# Altium PCB EE_smallOB_BW_v1.0.PcbDoc (part 1 of 4)
Units mil, origin at the board's own origin, x right, y up, seen from the top; angles counter-clockwise.
Board outline 1388 x 1586.96 mil, 4 copper layers (Top Layer, Layer 1, Layer 2, Bottom Layer), stack 37.371 mil thick; 116 components, 102 nets, 640 pads, 211 vias.
Unrouted connection lines stored in the file: 1.
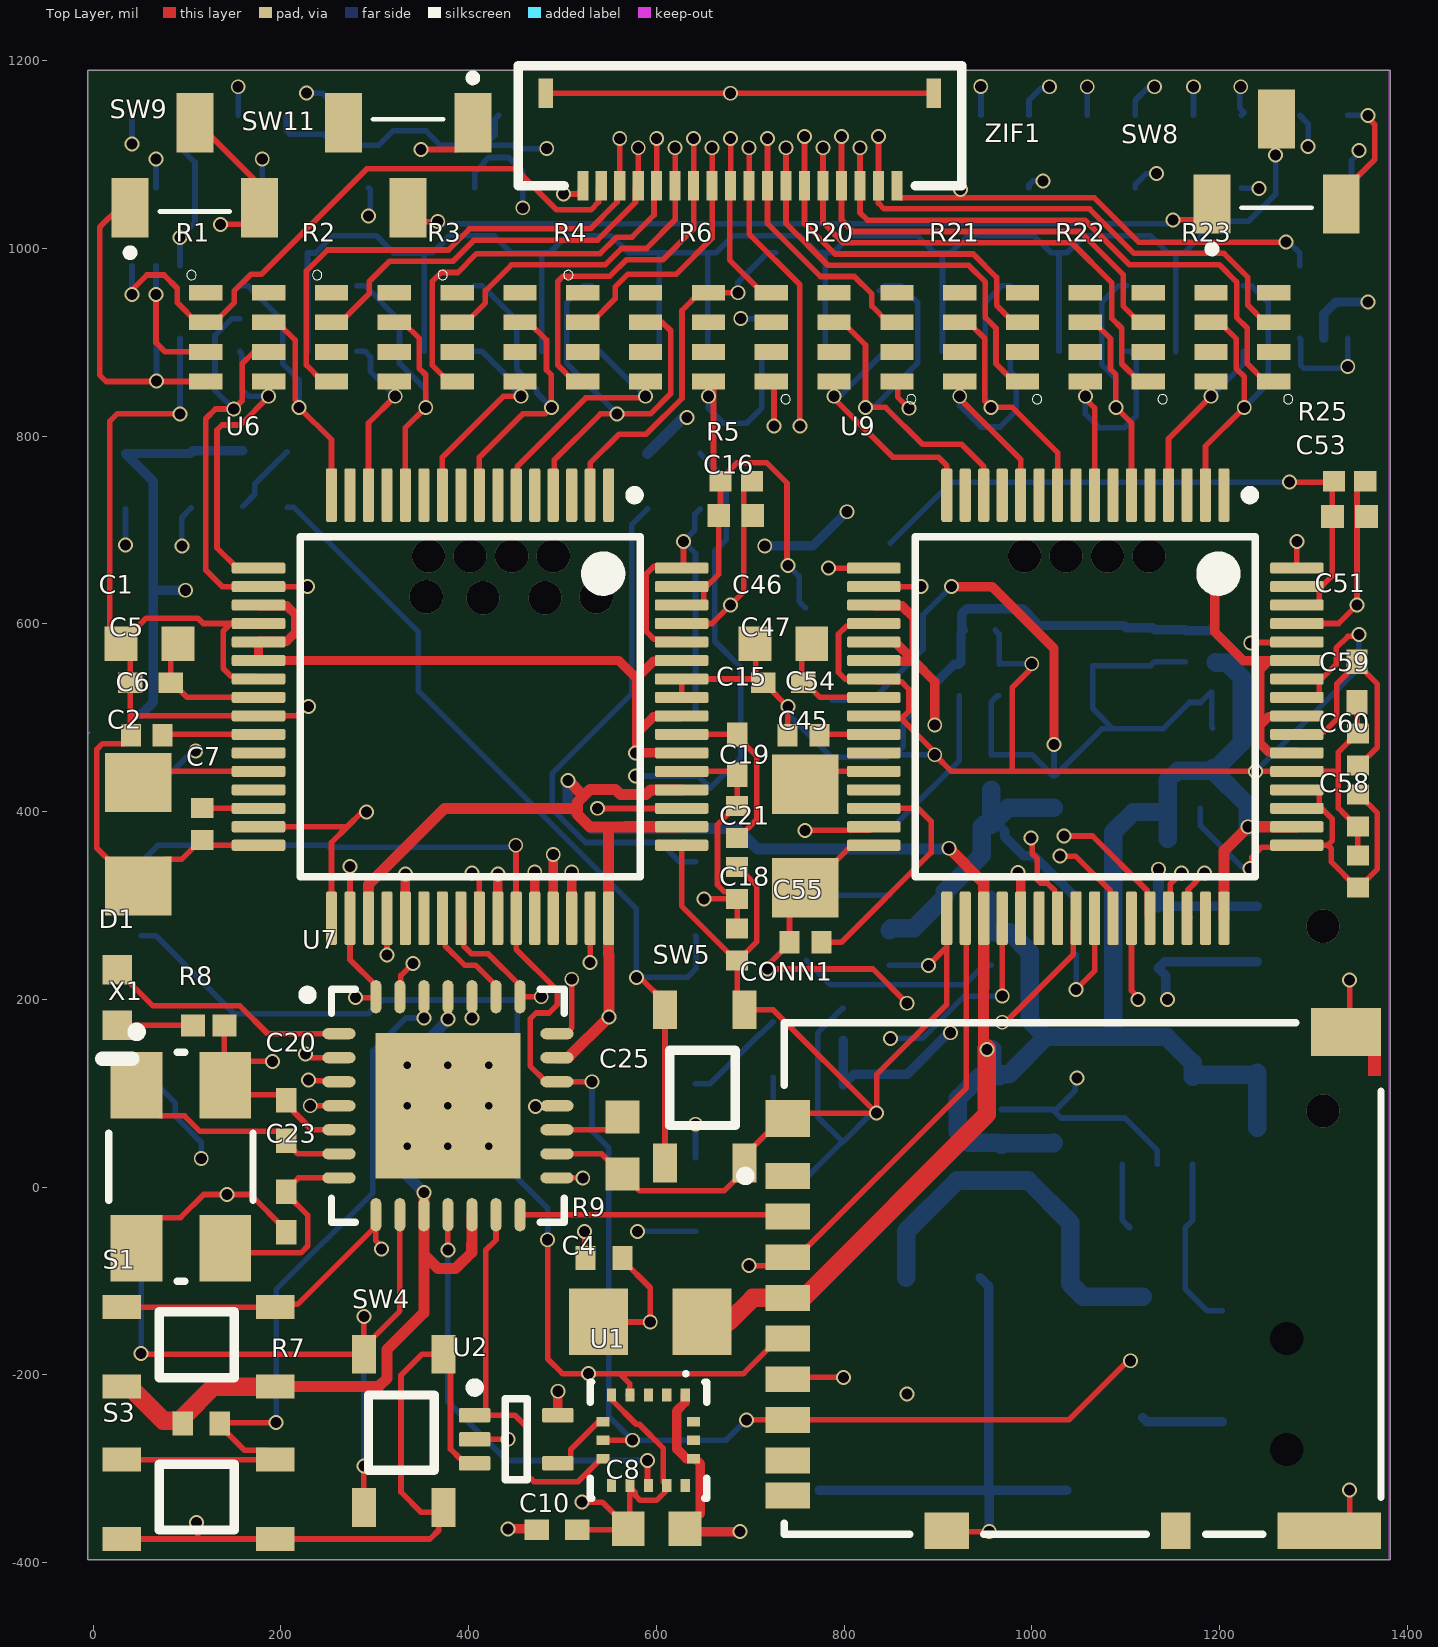
[diagram p0: Top Layer view]
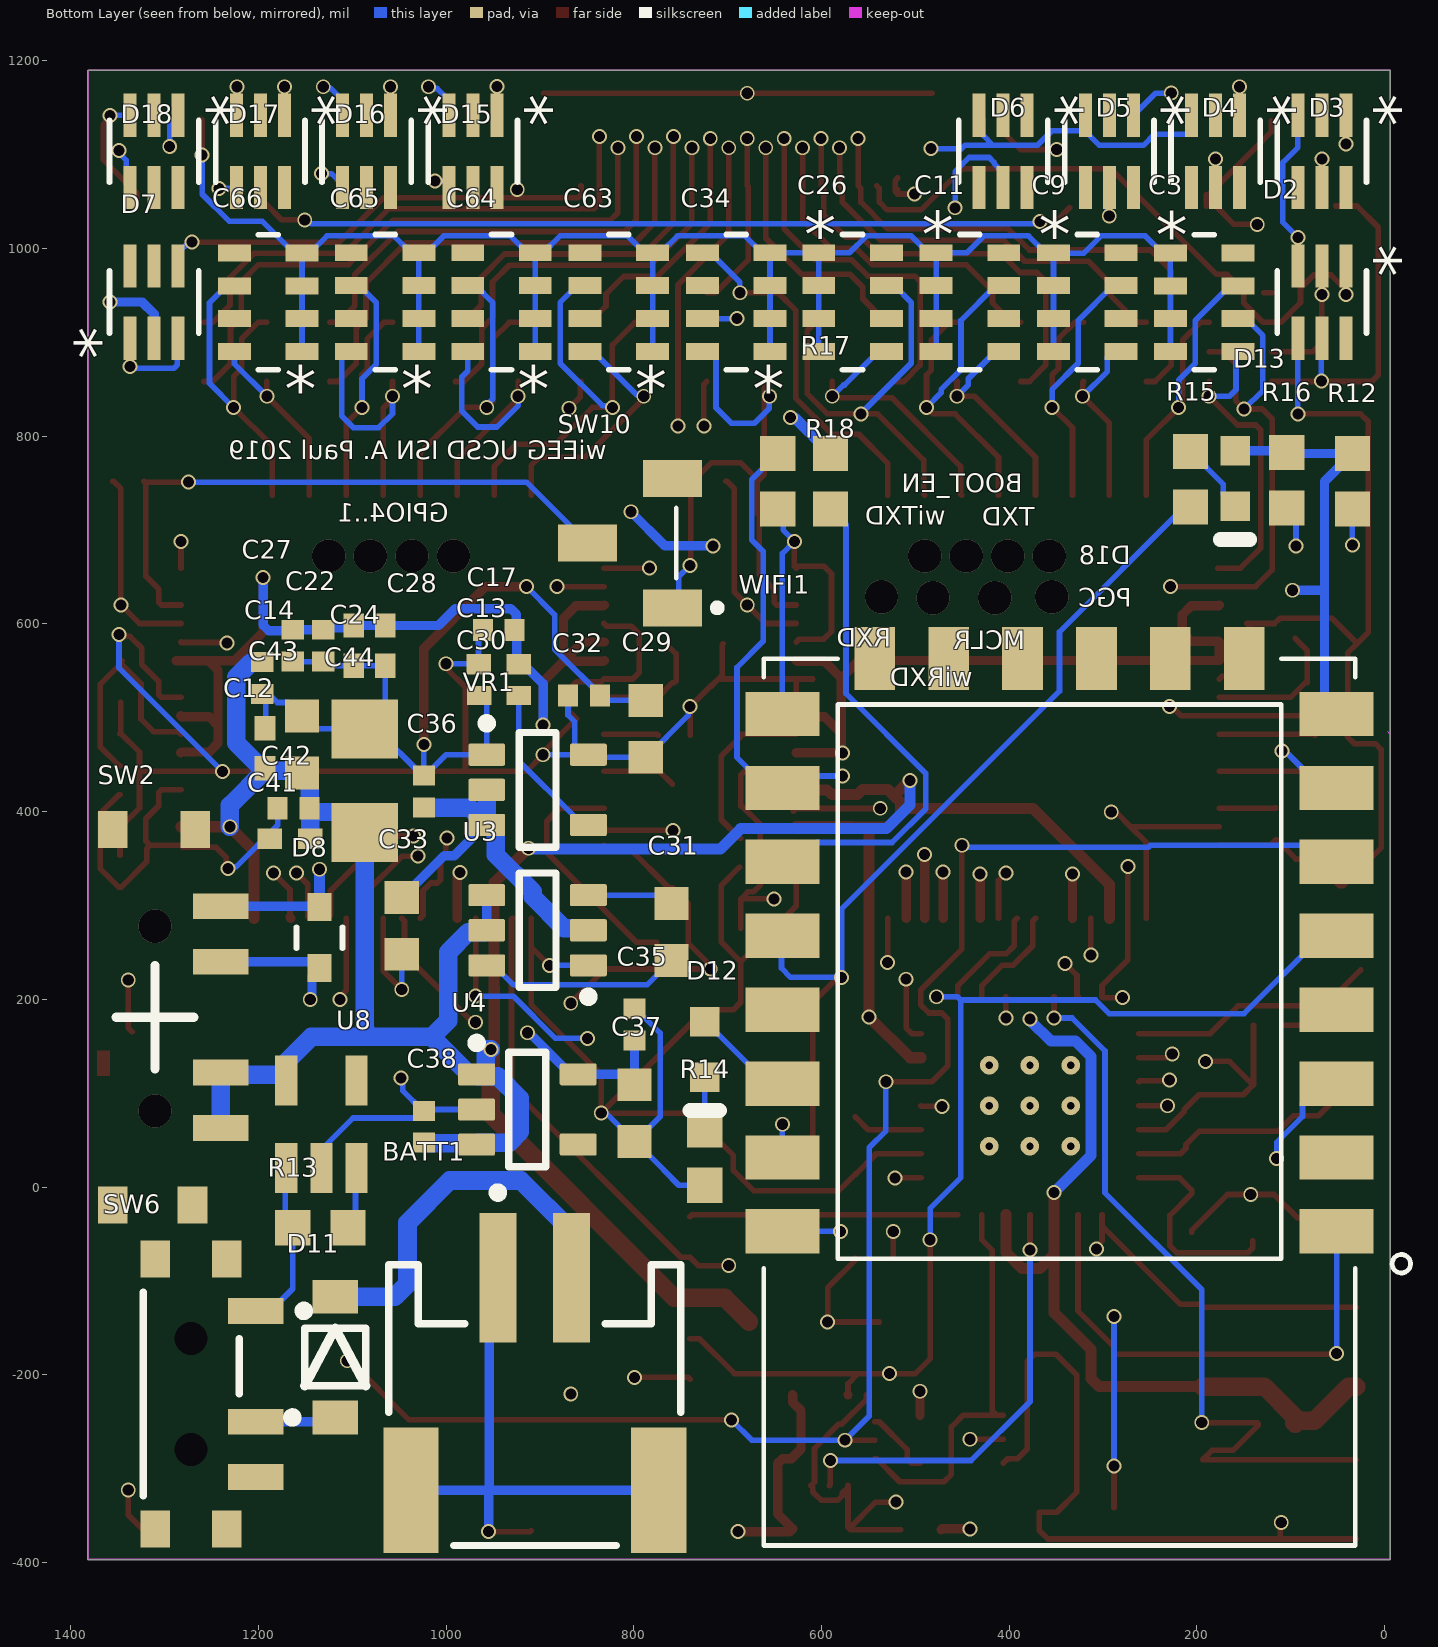
[diagram p1: Bottom Layer view, seen from below]
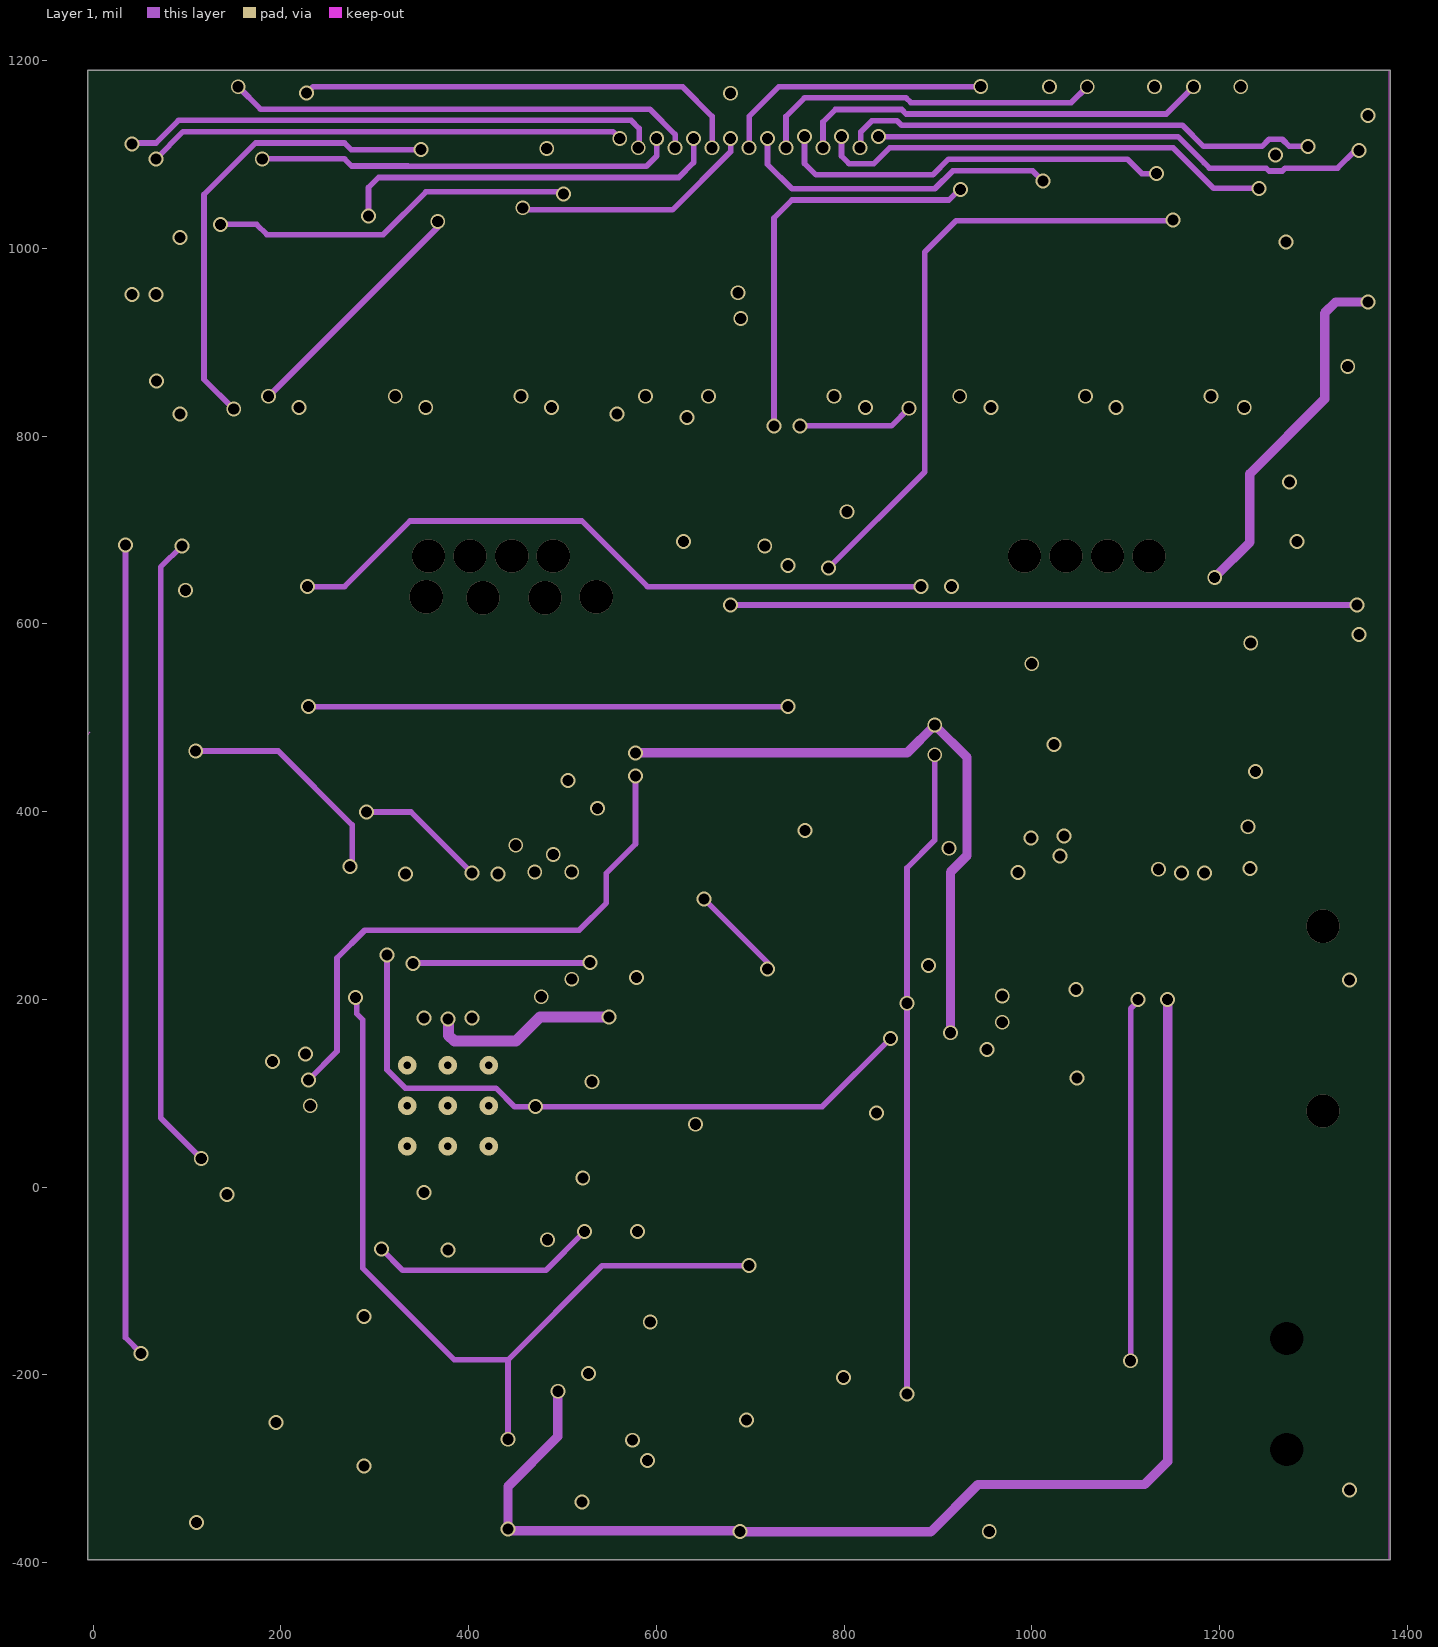
[diagram p2: Layer 1]
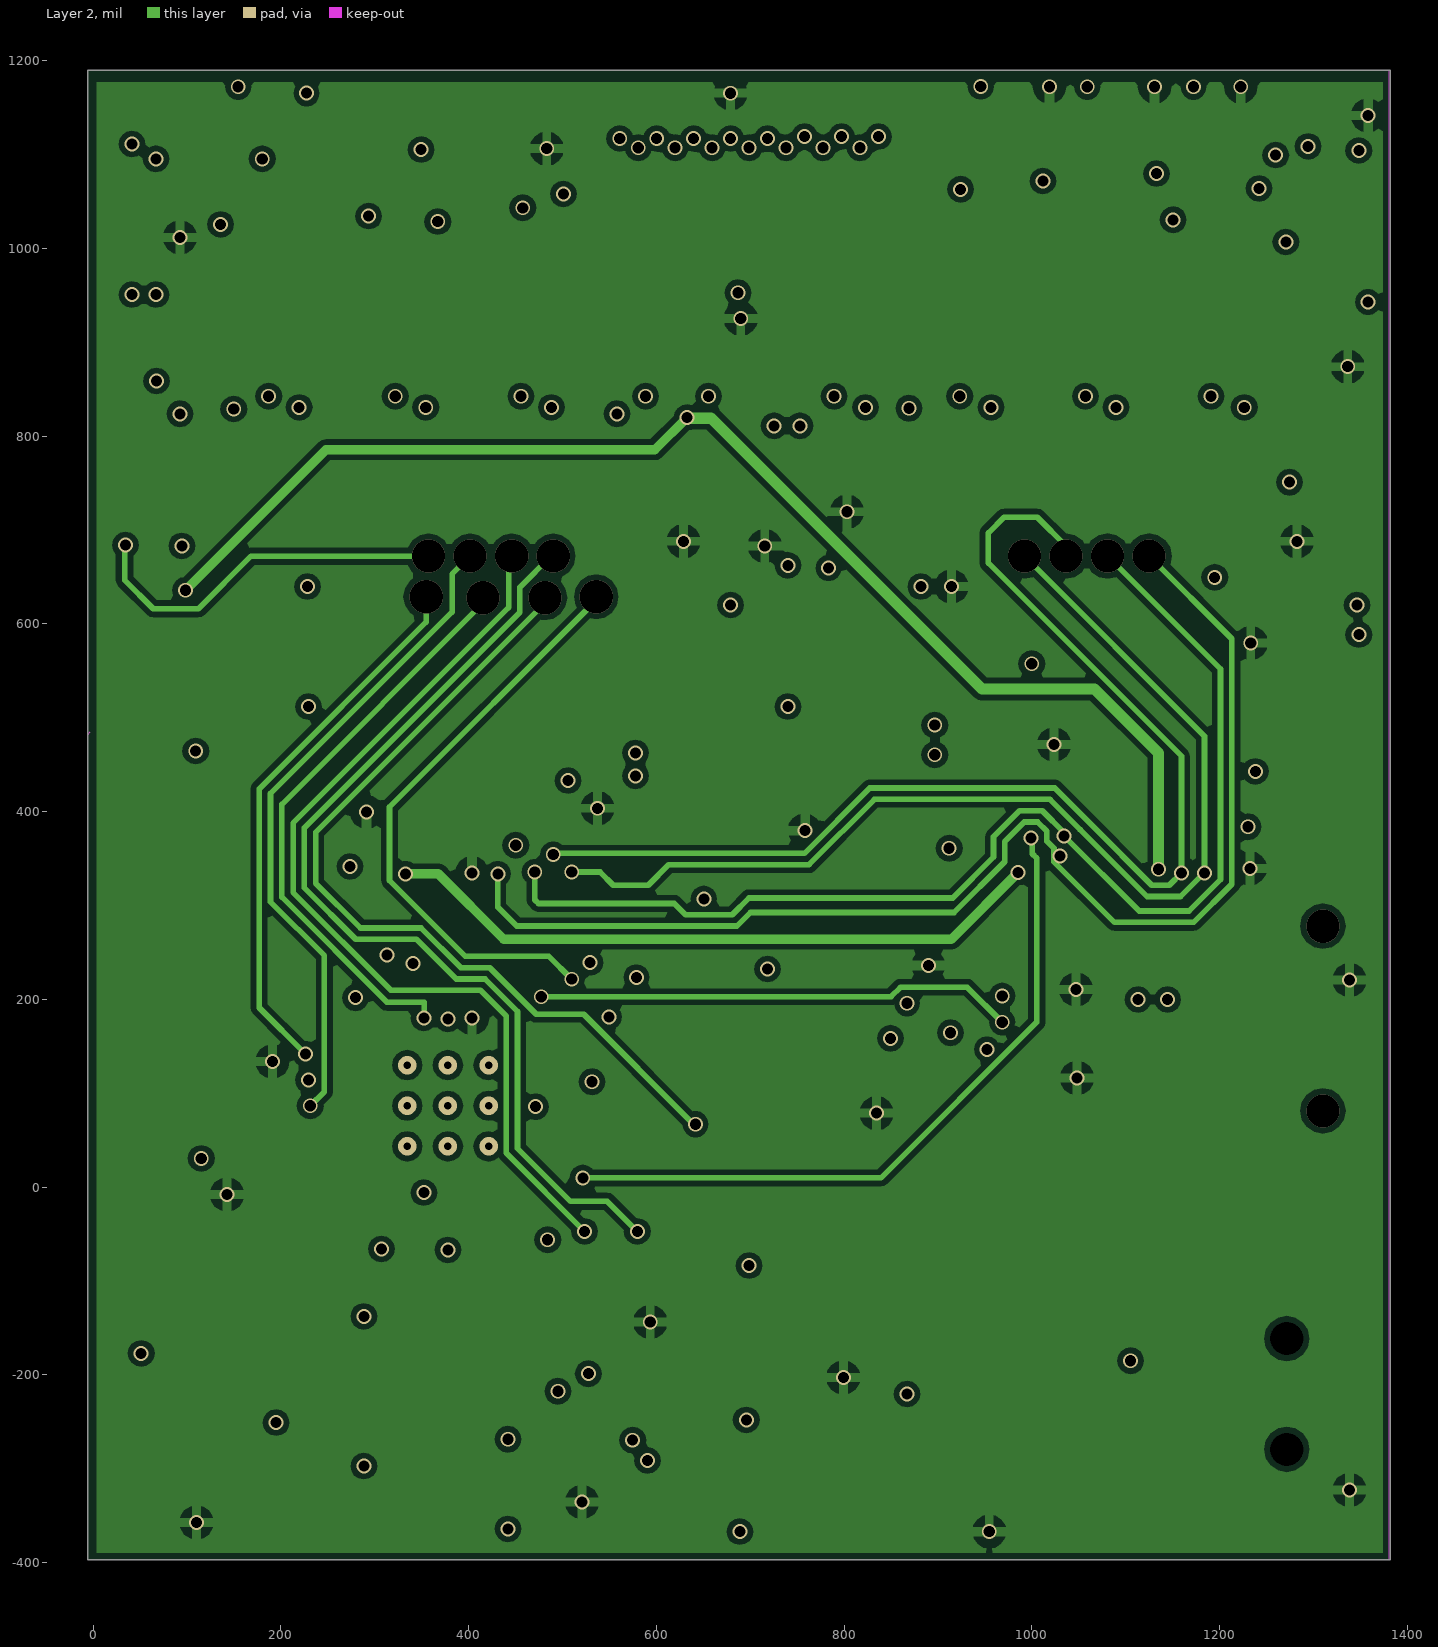
[diagram p3: Layer 2]
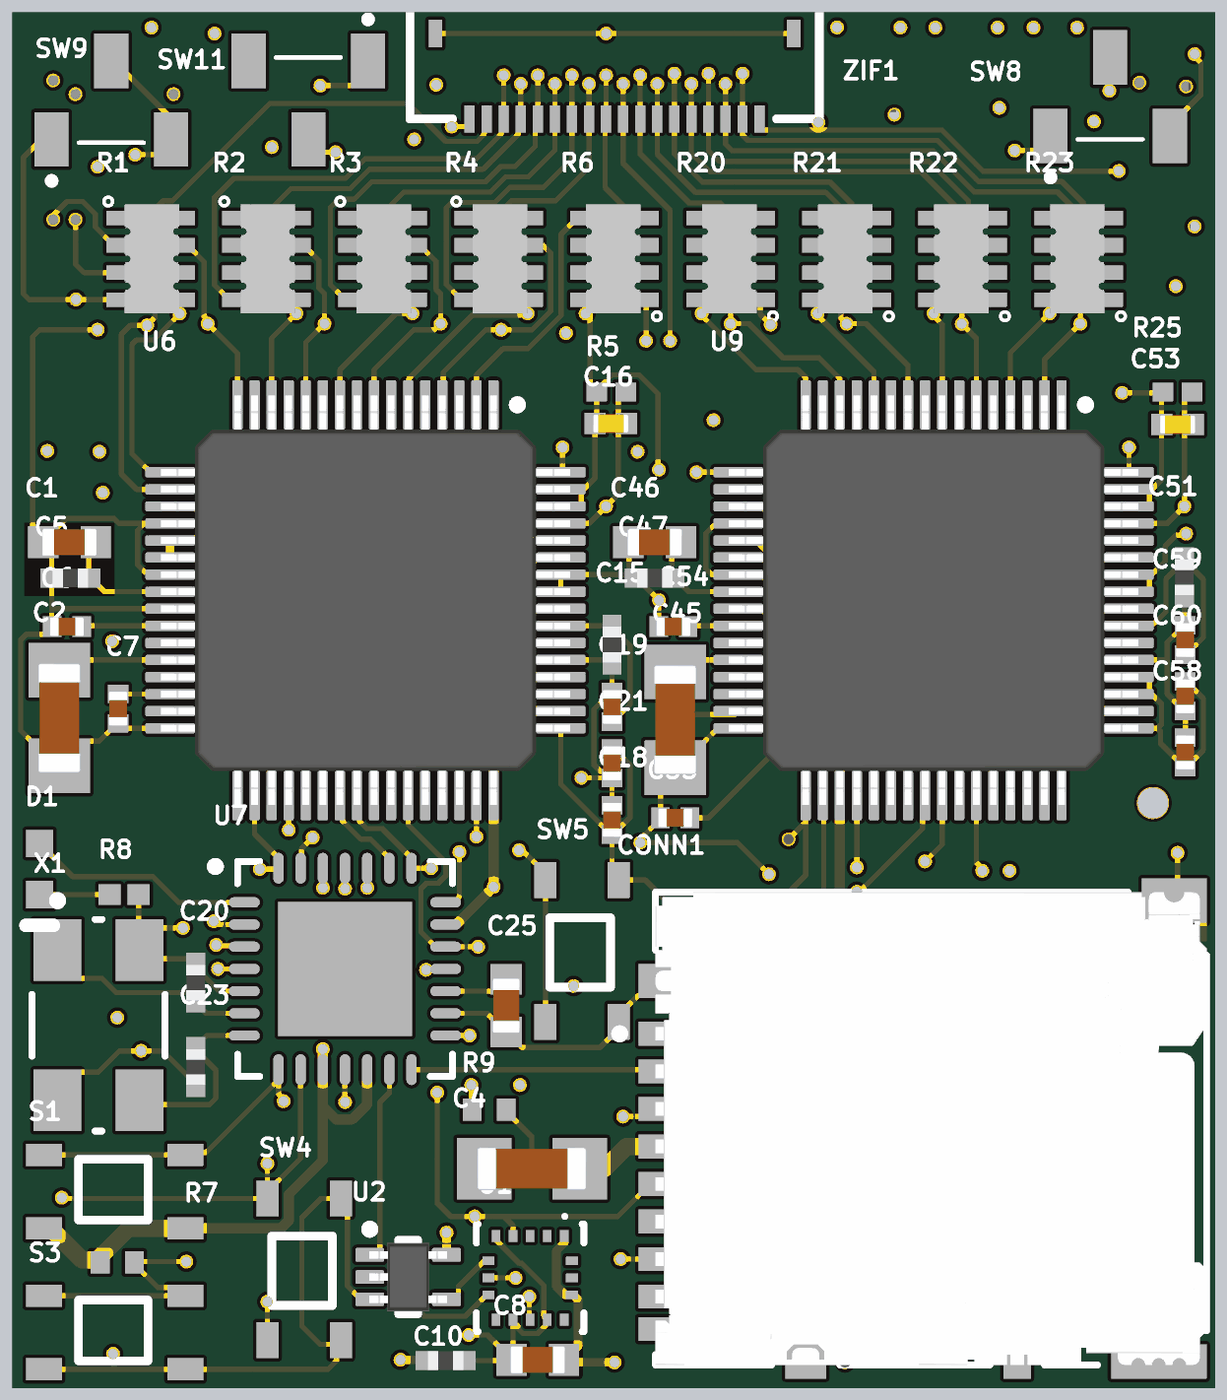
[diagram p5: 3D render of the assembled board from above, using the file's embedded part models]
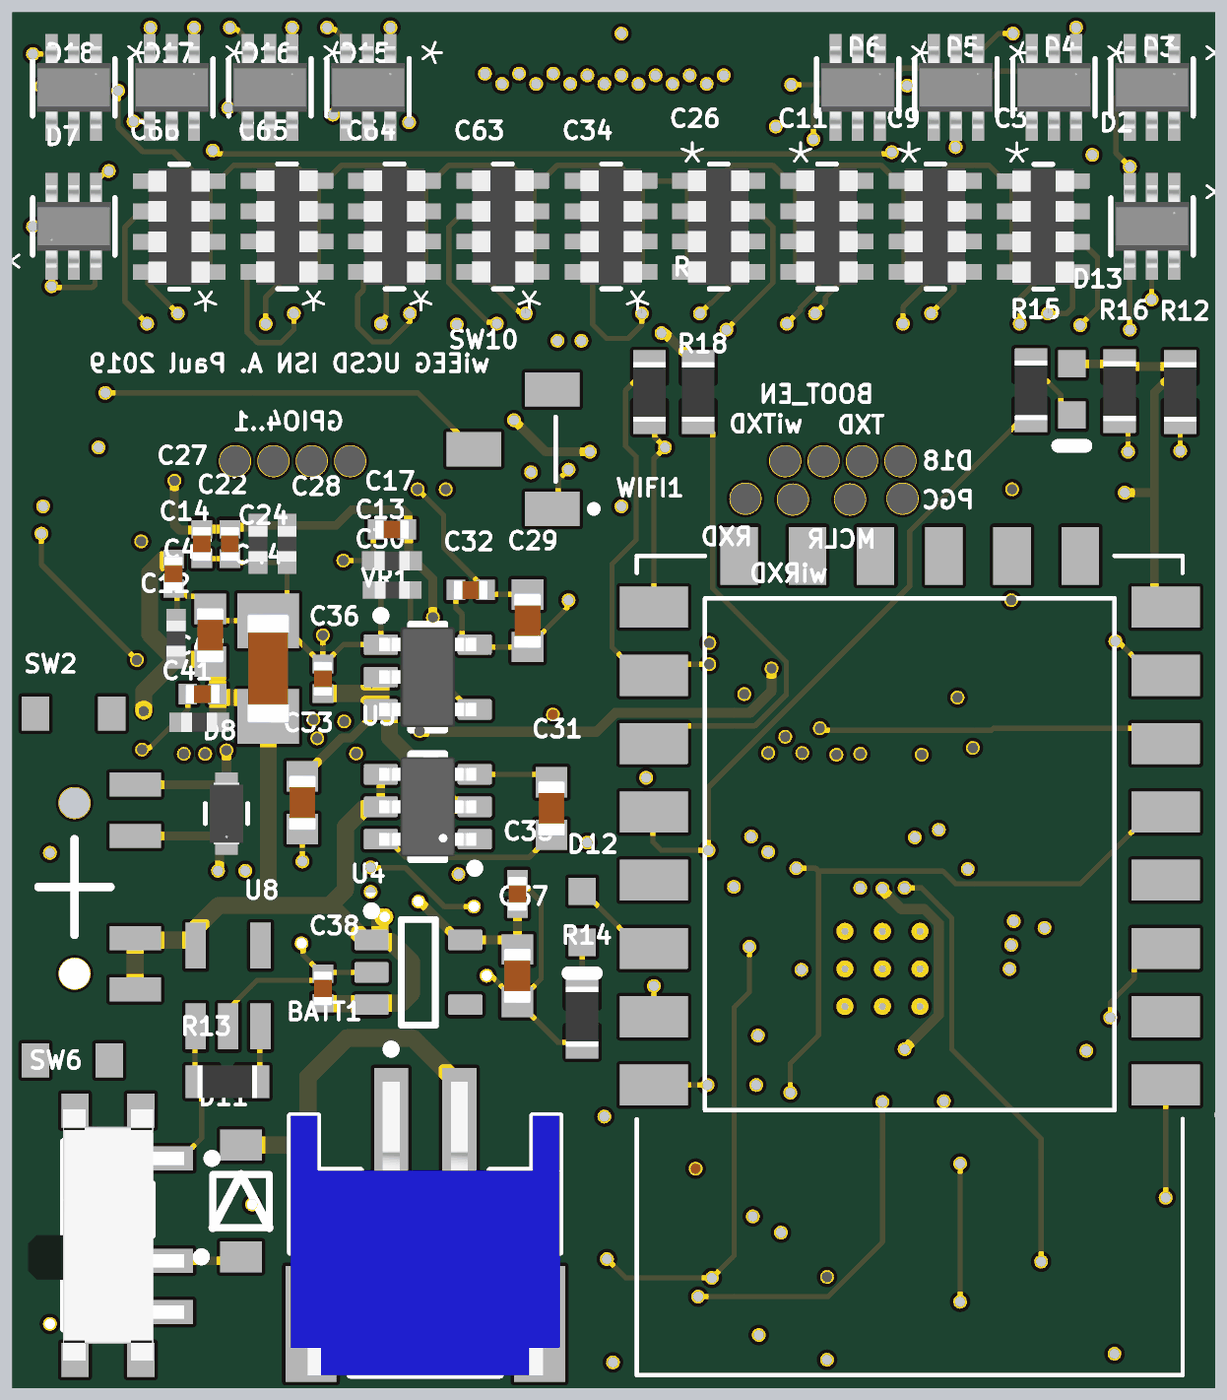
[diagram p6: 3D render of the assembled board from below, using the file's embedded part models]

## Layer stack, top to bottom
Top Solder: solder mask 1, SM-001, Dk 4
Top Layer: signal copper 1.3778
Dielectric 2: prepreg 2.8, PP-006, Dk 4.1
Layer 1: signal copper 1.3778
Dielectric 1: core 26.2598, Core-043, Dk 4.3
Layer 2: signal copper 1.3778
Dielectric 3: prepreg 2.8, PP-006, Dk 4.1
Bottom Layer: signal copper 1.3778
Bottom Solder: solder mask 1, SM-001, Dk 4

## Board outline
1382,1189.96 1382,-397 -6,-397 -6,1189.96

## Design rules (kind name [scope] priority, off if disabled: settings)
Clearance [All] p1: gap=6 ignorepadtopadclearanceinfootprint=FALSE
PolygonConnect [All] p1: connectstyle=Relief reliefconductorwidth=10 reliefentries=4 polygonreliefangle="90 Angle" airgapwidth=10
RoutingVias [All] p1: holewidth=11.81 width=23.78 viastyle="Through Hole" minholewidth=7.87 minwidth=15.87 maxholewidth=39.37 maxwidth=51.37
SolderMaskExpansion [All] p1: expansion=4 istentingtop=FALSE
Width Width_Power [(InNet('-RAW') OR InNet('+3V3') OR InNet('acl3V3') OR InNet('AVDD') OR InNet('DVDD') OR InNet('RAW'))] p1: maxlimit=19.68 minlimit=10 preferedwidth=19.68
Width [All] p2: maxlimit=20 minlimit=6 preferedwidth=10
30 further rules are at their usual default settings.

## Classes and differential pairs
component class wifi: D12 D13 R12 R14 R15 R16 R17 R18 SW4 SW5 WIFI1
component class sd_accel: C4 C8 C10 CONN1 U1 U2
component class power_supply: BATT1 C12 C13 C14 C17 C22 C24 C27 C28 C29 C30 C31 C32 C33 C35 C36 C37 C38 C41 C42 C43 C44 D8 D11 R13 SW2 SW6 U3 U4 U8 VR1
component class PIC: C20 C23 C25 D1 R7 R8 R9 S1 S3 U7 X1
component class interface2: C63 C64 C65 C66 D15 D16 D17 D18 R20 R21 R22 R23
component class interface1: C3 C9 C11 C26 C34 D2 D3 D4 D5 D6 D7 R1 R2 R3 R4 R6 SW8
component class Connectors: SW9 ZIF1
component class ADS_2: C45 C46 C47 C51 C53 C54 C55 C58 C59 C60 R25 SW10 U9
component class ADS_1: C1 C2 C5 C6 C7 C15 C16 C18 C19 C21 R5 SW11 U6

## Components (designator, comment, footprint, x,y, rotation, side; value= is the part's Value field where it differs from the comment)
BATT1 "S2B-PH-SM4-TB(LF)(SN)" "JST- S2B-PH-SM4-TB(LF)(SN)-2_V" 905.51,-232.28 r180 bottom
C1 "GRM188C80G106KE47D" *CAPC1608X90N 60.04,578.74 r180 top
C2 "GRM31CR60J107ME39K" *CAPC3216X190 48.23,375.98 r270 top
C3 "CA064C102K5RACTU" CA064 192.35,942.7 r180 bottom
C4 "GRM31CR60J107ME39K" *CAPC3216X190 593.5,-143.7 r180 top
C5 "CC0402KRX7R7BB104" YAG_CC0402 61.02,537.4 r180 top
C6 "GRM155R70J105KA12J" *CAPC1005X55N 57.09,481.3 r180 top
C7 "GRM155R70J105KA12J" *CAPC1005X55N 116.14,386.81 r270 top
C8 "GRM188C80G106KE47D" *CAPC1608X90N 600.39,-364.17 r180 top
C9 "CA064C102K5RACTU" CA064 316.93,942.91 r180 bottom
C10 "CC0402KRX7R7BB104" YAG_CC0402 494.09,-365.16 r0 top
C11 "CA064C102K5RACTU" CA064 441.93,942.91 r180 bottom
C12 "CC0402KRX7R7BB104" YAG_CC0402 1192.91,467.52 r90 bottom
C13 "CC0402KRX7R7BB104" YAG_CC0402 943.9,557.09 r0 bottom
C14 "GRM155R70J105KA12J" *CAPC1005X55N 1195.87,542.32 r270 bottom
C15 "CC0402KRX7R7BB104" YAG_CC0402 686.02,460.63 r90 top
C16 "CC0402KRX7R7BB102" CAPC1005X55X23NL05T08 684.65,715.55 r0 top
C17 "GRM155R70J105KA12J" *CAPC1005X55N 943.9,593.5 r0 bottom
C18 "GRM155R70J105KA12J" *CAPC1005X55N 686.02,258.58 r270 top
C19 "GRM155R70J105KA12J" *CAPC1005X55N 686.02,388.78 r270 top
C20 "CC0402JRNPO9BN180" YAG_CC0402 205.71,70.87 r270 top
C21 "GRM155R70J105KA12J" *CAPC1005X55N 686.02,323.82 r90 top
C22 "GRM155R70J105KA12J" *CAPC1005X55N 1130.91,576.77 r270 bottom
C23 "CC0402JRNPO9BN180" YAG_CC0402 205.71,-26.57 r90 top
C24 "CC0402KRX7R7BB104" YAG_CC0402 1098.43,576.77 r270 bottom
C25 "GRM188C80G106KE47D" *CAPC1608X90N 563.98,44.29 r270 top
C26 "CA064C102K5RACTU" CA064 566.93,942.91 r180 bottom
C27 "GRM155R70J105KA12J" *CAPC1005X55N 1163.39,576.77 r270 bottom
C28 "CC0402KRX7R7BB104" YAG_CC0402 1064.96,576.77 r270 bottom
C29 "GRM188C80G106KE47D" *CAPC1608X90N 787.4,488.19 r90 bottom
C30 "CC0402KRX7R7BB103" CC0402N 943.57,523.62 r180 bottom
C31 "GRM188C80G106KE47D" *CAPC1608X90N 759.84,271.65 r90 bottom
C32 "GRM155C80J225ME95D" *CAPC1005X55N 853.07,523.62 r180 bottom
C33 "GRM188C80G106KE47D" *CAPC1608X90N 1047.24,278.35 r90 bottom
C34 "CA064C102K5RACTU" CA064 690.94,942.91 r0 bottom
C35 "GRM155C80J225ME95D" *CAPC1005X55N 799.21,173.23 r90 bottom
C36 "GRM155C80J225ME95D" *CAPC1005X55N 1023.62,421.26 r90 bottom
C37 "GRM188C80G106KE47D" *CAPC1608X90N 799.21,78.74 r270 bottom
C38 "GRM155C80J225ME95D" *CAPC1005X55N 1023.62,64.25 r90 bottom
C41 "CC0402KRX7R7BB104" YAG_CC0402 1166.34,371.06 r0 bottom
C42 "GRM155R70J105KA12J" *CAPC1005X55N 1162.4,403.54 r0 bottom
C43 "GRM188C80G106KE47D" *CAPC1608X90N 1153.54,471.46 r90 bottom
C44 "GRM31CR60J107ME39K" *CAPC3216X190 1086.61,433.07 r90 bottom
C45 "GRM31CR60J107ME39K" *CAPC3216X190 758.86,374.02 r270 top
C46 "GRM188C80G106KE47D" *CAPC1608X90N 735.24,578.74 r180 top
C47 "CC0402KRX7R7BB104" YAG_CC0402 735.24,537.4 r180 top
C51 "CC0402KRX7R7BB104" YAG_CC0402 1346.46,538.11 r90 top
C53 "CC0402KRX7R7BB102" CAPC1005X55X23NL05T08 1338.58,714.57 r0 top
C54 "GRM155R70J105KA12J" *CAPC1005X55N 756.89,481.3 r180 top
C55 "GRM155R70J105KA12J" *CAPC1005X55N 758.86,260.83 r180 top
C58 "GRM155R70J105KA12J" *CAPC1005X55N 1347.44,336.34 r270 top
C59 "GRM155R70J105KA12J" *CAPC1005X55N 1347.44,465.98 r270 top
C60 "GRM155R70J105KA12J" *CAPC1005X55N 1347.44,401.02 r90 top
C63 "CA064C102K5RACTU" CA064 815.94,942.91 r0 bottom
C64 "CA064C102K5RACTU" CA064 940.94,942.91 r0 bottom
C65 "CA064C102K5RACTU" CA064 1064.96,942.91 r0 bottom
C66 "CA064C102K5RACTU" CA064 1189.54,942.7 r0 bottom
CONN1 "DM3AT-SF-PEJM5" HRS-DM3AT-8_V 1037.4,-100.39 r90 top
D1 "LTST-C193TBKT-5A" LTST-C193TBKT_V 25.59,201.77 r270 top
D2 "TPD4E1B06DCKR" DCK6 66.93,942.91 r270 bottom
D3 "TPD4E1B06DCKR" DCK6 66.93,1103.35 r270 bottom
D4 "TPD4E1B06DCKR" DCK6 180.12,1103.35 r270 bottom
D5 "TPD4E1B06DCKR" DCK6 293.31,1103.35 r270 bottom
D6 "TPD4E1B06DCKR" DCK6 406.5,1103.35 r270 bottom
D7 "TPD4E1B06DCKR" DCK6 1311.02,942.91 r90 bottom
D8 "CDSU400B" CDBU 1134.84,265.75 r90 bottom
D11 "MBR120VLSFT3G" ONSC-SOD-123FL-2-498-01_V 1118.11,-181.1 r90 bottom
D12 "LTST-C193TBKT-5A" LTST-C193TBKT_V 724.41,146.65 r270 bottom
D13 "LTST-C193TBKT-5A" LTST-C193TBKT_V 159.45,754.92 r270 bottom
D15 "TPD4E1B06DCKR" DCK6 971.46,1103.35 r270 bottom
D16 "TPD4E1B06DCKR" DCK6 1084.65,1103.35 r270 bottom
D17 "TPD4E1B06DCKR" DCK6 1197.83,1103.35 r270 bottom
D18 "TPD4E1B06DCKR" DCK6 1311.02,1103.35 r270 bottom
R1 "CAY16-2201F4LF" *RESCAXE80P320X160-8N 153.54,905.51 r0 top
R2 "CAY16-2201F4LF" *RESCAXE80P320X160-8N 287.4,905.51 r0 top
R3 "CAY16-2201F4LF" *RESCAXE80P320X160-8N 421.26,905.51 r0 top
R4 "CAY16-2201F4LF" *RESCAXE80P320X160-8N 555.12,905.51 r0 top
R5 "RC0402JR-071ML" RESC1005X40X25NL05T10 685.04,751.97 r0 top
R6 "CAY16-2201F4LF" *RESCAXE80P320X160-8N 688.98,905.51 r180 top
R7 "RC0402JR-07470KL" RESC0402(1005)_N 115.16,-251.97 r180 top
R8 "RT0402FRE071KL" RESC1005X35X25NL10T10 123.03,172.24 r0 top
R9 "RC0402JR-07470KL" RESC0402(1005)_N 544.29,-75.79 r180 top
R12 "10K" RESC1609X55X30NL15T15 34.45,751.97 r90 bottom
R13 "10K" RESC1609X55X30NL15T15 1133.86,-43.31 r0 bottom
R14 "1K" RESC1609X55X30NL15T15 724.41,31.5 r90 bottom
R15 "1K" RESC1609X55X30NL15T15 206.69,753.94 r90 bottom
R16 "10K" RESC1609X55X30NL15T15 104.33,752.95 r90 bottom
R17 "10K" RESC1609X55X30NL15T15 646.65,751.97 r90 bottom
R18 "10K" RESC1609X55X30NL15T15 590.55,751.97 r90 bottom
R20 "CAY16-2201F4LF" *RESCAXE80P320X160-8N 822.83,905.51 r180 top
R21 "CAY16-2201F4LF" *RESCAXE80P320X160-8N 956.69,905.51 r180 top
R22 "CAY16-2201F4LF" *RESCAXE80P320X160-8N 1090.55,905.51 r180 top
R23 "CAY16-2201F4LF" *RESCAXE80P320X160-8N 1224.41,905.51 r180 top
R25 "RC0402JR-071ML" RESC1005X40X25NL05T10 1338.58,751.97 r0 top
S1 "PTS810SJK250SMTRLFS" PTS810 30.51,-127.95 r0 top
S3 "PTS810SJK250SMTRLFS" PTS810 30.51,-290.36 r0 top
SW2 "CUS-13TB" CUS-13TB 1310.16,181.1 r270 bottom
SW4 "PTS810SJK250SMTRLFS" PTS810 288.39,-341.53 r90 top
SW5 "PTS810SJK250SMTRLFS" PTS810 609.25,25.59 r90 top
SW6 "SPDT" CKCP-PCM12SMTR_V 1271.65,-220.47 r270 bottom
SW8 "CJS-1200TA" *SW_CJS-1200TA 1260.83,1092.52 r0 top
SW9 "CJS-1200TA" *SW_CJS-1200TA 108.27,1088.58 r0 top
SW10 "CJS-1200TA" *SW_CJS-1200TA 804.13,686.02 r90 bottom
SW11 "CJS-1200TA" *SW_CJS-1200TA 335.63,1088.58 r180 top
U1 "LIS3DHTR" STM-LGA-16 591.54,-269.69 r270 top
U2 "SN74LVC1G32DCKR" DCK0005A_N 450.79,-268.7 r0 top
U3 "LM2664M6/NOPB" DBV0006A_N 902.56,273.62 r0 bottom
U4 "TLV70025QDDCRQ1" DDC0005A_N 913.39,82.68 r180 bottom
U6 "ADS1299IPAG" PAG0064A_N 401.57,511.81 r270 top
U7 "PIC32MX250F128B-I/ML" MCHP-QFN-ML28_N 377.95,86.61 r0 top
U8 "AP2112K-3.3TRG1" *SOT95P285X140-5N 1132.87,66.93 r90 bottom
U9 "ADS1299IPAG" PAG0064A_N 1057.09,511.81 r270 top
VR1 "TPS72325DBVR" DBV0005A_N 902.56,423.23 r180 bottom
WIFI1 "2491" *XCVR_ESP8266-12E/ESP-12E 346.46,228.35 r0 bottom
X1 "ABMM2-8.000MHZ-E2-T" ABRA-ABMM2-4_V 93.5,21.65 r270 top
ZIF1 "FH34SRJ-18S-0.5SH(50)" ZIF_18S 895.67,1066.93 r180 top

## Footprints (in the part's own frame and the unit in brackets; to place one, negate y for a bottom-side part, rotate by r counter-clockwise, add the part's x,y. Pads: shape width x height; smd on the part's side, far side on the other; paste and mask are expansions set on the pad)
*CAPC1005X55N [mm]
  rect 0.54x0.6 smd: 1(-0.432,0) 2(0.432,0)
  body extent -0.5,-0.27 0.5,0.28, height 0.45
*CAPC1608X90N [mm]
  rect 0.89x0.93 smd: 1(-0.77,0) 2(0.77,0)
  body extent -0.8,-0.4 0.8,0.4, height 0.78
*CAPC3216X190 [mm]
  rect 1.6x1.8 smd: 1(-1.4,0) 2(1.4,0)
  body extent -1.6,-0.62 1.6,0.63, height 1.56
*RESCAXE80P320X160-8N [mm]
  rect 0.9x0.425 smd: 1(-0.85,1.2) 2(-0.85,0.4) 3(-0.85,-0.4) 4(-0.85,-1.2) 5(0.85,-1.2) 6(0.85,-0.4) 7(0.85,0.4) 8(0.85,1.2)
  silkscreen extent -1.37,1.55 -1.11,1.81, body extent -0.76,-1.6 0.84,1.6, height 0.47
*SOT95P285X140-5N [mm]
  rect 1.35x0.6 smd: 1(-1.185,0.95) 2(-1.185,0) 3(-1.185,-0.95) 4(1.185,-0.95) 5(1.185,0.95)
*SW_CJS-1200TA [mm]
  rect 1x1.6 smd: 1(-1.75,-1.15) 2(0,1.15) 3(1.75,-1.15)
  silkscreen extent -1.85,-2.46 0.95,-1.25
*XCVR_ESP8266-12E/ESP-12E [mm]
  rect 2x1.2 smd: 1(-7.5,7) 2(-7.5,5) 3(-7.5,3) 4(-7.5,1) 5(-7.5,-1) 6(-7.5,-3) 7(-7.5,-5) 8(-7.5,-7) 15(7.5,-7) 16(7.5,-5) 17(7.5,-3) 18(7.5,-1) 19(7.5,1) 20(7.5,3) 21(7.5,5) 22(7.5,7)
  rect 1.1x1.7 smd: 9(-5,-8.5) 10(-3,-8.5) 11(-1,-8.5) 12(1,-8.5) 13(3,-8.5) 14(5,-8.5)
  silkscreen extent -9.5,-8.5 8,15.5
ABRA-ABMM2-4_V [mm] "SMD, 4-Leads, Body 6.2x3.9mm, Pitch 4.4mm, Height 1.2mm"
  rect 1.8x1.4 smd: 1(-2.2,-1.2) 2(2.2,-1.2) 3(2.2,1.2) 4(-2.2,1.2)
  Top Layer region: -3.584,1.064 -3.584,1.064 -3.584,1.064 -3.584,1.064
  silkscreen extent -3.77,-1.95 3.1,1.95, body extent -3.1,-1.95 3.1,1.95, height 1.2
CA064 [mil]
  rect 35x18 smd paste+0 mask+0: 1(-36,52.5) 2(-36,17.5) 3(-36,-17.5) 4(-36,-52.5) 5(36,-52.5) 6(36,-17.5) 7(36,17.5) 8(36,52.5)
  silkscreen extent -11,-72 11,72, body extent -36,-67 36,67, height 40
CAPC1005X55X23NL05T08 [mm] "Chip Capacitor, 2-Leads, Body 1.05x0.55mm, IPC Medium Density"
  rect 0.62x0.62 smd: 1(-0.46,0) 2(0.46,0)
  body extent -0.53,-0.28 0.53,0.28, height 0.55
CC0402N [mil]
  rect 26x20 smd paste+0 mask+0: 1(-21,0) 2(21,0)
  body extent -20,-10 20,10, height 28
CDBU [mil]
  rect 30x26 smd paste+0 mask+0: 1(-32.5,0) 2(32.5,0)
  silkscreen extent -11,-25 11,24, body extent -36,-19 36,19, height 33
CKCP-PCM12SMTR_V [mm] "SMD, 3-Leads, Body 6.7x2.6mm"
  rect 0.7x1.5 smd: 1(-2.25,1.75) 2(0.75,1.75) 3(2.25,1.75)
  round 0.6 hole 0.9 unplated: MH1(-1.5,0) MH2(1.5,0)
  rect 1x0.8 smd: MP1(-3.65,0.965) MP2(3.65,0.965) MP3(-3.65,-0.965) MP4(3.65,-0.965)
  silkscreen extent -2.75,-1.3 2.75,3.17, body extent -3.68,-2.34 3.67,2.23, height 1.4
CUS-13TB [mm]
  rect 1x0.8 smd: 0(-5.08,-1.143) 0(-5.08,1.092) 0(5.08,-1.143) 0(5.08,1.016)
  rect 0.7x1.5 smd: 1(-3,1.778) 2(-1.496,1.778) 3(1.5,1.778) 4(3,1.778)
  silkscreen extent -1.4,-1.05 1.4,1.05
DBV0005A_N [mm] "SOT23, 5-Leads, Body 3.05x1.75mm, Pitch 0.95mm, IPC Medium Density"
  rrect17% 1x0.6 smd: 1(-1.375,0.95) 2(-1.375,0) 3(-1.375,-0.95) 4(1.375,-0.95) 5(1.375,0.95)
  silkscreen extent -1.5,-1.55 0.5,1.92, body extent -1.42,-1.46 1.42,1.46, height 1.08
DBV0006A_N [mm] "SOT23, 6-Leads, Body 3.05x1.75mm, Pitch 0.95mm, IPC Medium Density"
  rrect17% 1x0.6 smd: 1(-1.375,0.95) 2(-1.375,0) 3(-1.375,-0.95) 4(1.375,-0.95) 5(1.375,0) 6(1.375,0.95)
  silkscreen extent -1.5,-1.55 0.5,1.92, body extent -1.42,-1.46 1.42,1.46, height 1.11
DCK0005A_N [mm] "SOT23, 5-Leads, Body 2.15x1.4mm, Pitch 0.65mm, IPC Medium Density"
  rrect25% 0.85x0.4 smd: 1(-1.125,0.65) 2(-1.125,0) 3(-1.125,-0.65) 4(1.125,-0.65) 5(1.125,0.65)
  silkscreen extent -1.25,-1.1 0.3,1.52, body extent -1.14,-1 1.14,1, height 0.94
DCK6 [mil]
  rect 46x14 smd paste+0 mask+0: 1(-38.5,25.59) 2(-38.5,0) 3(-38.5,-25.59) 4(38.5,-25.59) 5(38.5,0) 6(38.5,25.59)
  silkscreen extent -33,-48 33,47, body extent -48,-43 48,43, height 43
DDC0005A_N [mm] "SOT23, 5-Leads, Body 3.05x1.75mm, Pitch 0.95mm, IPC Medium Density"
  rrect17% 1x0.6 smd: 1(-1.375,0.95) 2(-1.375,0) 3(-1.375,-0.95) 4(1.375,-0.95) 5(1.375,0.95)
  silkscreen extent -1.5,-1.55 0.5,1.92, body extent -0.88,-1.52 0.87,1.53, height 1.1
HRS-DM3AT-8_V [mm] "SMD, 8-Leads, Body 16.15x13.85mm, Pitch 1.1mm"
  rect 0.7x1.2 smd: 1(2.85,7.55) 2(1.75,7.55) 3(0.65,7.55) 4(-0.45,7.55) 5(-1.55,7.55) 6(-2.65,7.55) 7(-3.75,7.55) 8(-4.85,7.55) 10(-5.8,7.55)
  rect 1x0.8 smd: 9(-6.75,-2.95)
  rect 1x1.2 smd: 11(4.4,7.55) 14(-6.75,3.25)
  rect 1.3x1.9 smd: 12(6.75,-7.55)
  rect 1x2.8 smd: 13(-6.75,-7.1)
  Top Layer region: 6.25,-8.5 6.25,-8.15 5.55,-8.15 5.55,-8.5
  silkscreen extent -6.85,-8.5 7,8.82, body extent -6.85,-8.5 7,7.65, height 1.68
"JST- S2B-PH-SM4-TB(LF)(SN)-2_V" [mm] "SMD, 2-Leads, Body 7.9x7.6mm, Pitch 2mm"
  rect 1x3.5 smd: 1(-1,3.45) 2(1,3.45)
  rect 1.5x3.4 smd: MP1(-3.35,-2.3) MP2(3.35,-2.3)
  silkscreen extent -3.95,-3.8 3.95,5.87, body extent -3.95,-3.8 3.95,4.8, height 5.6
LTST-C193TBKT_V [mm] "SMD, 2-Leads, Body 0.8x1.6mm"
  rect 0.8x0.8 smd: 1(-0.75,0) 2(0.75,0)
  silkscreen extent 1.65,-0.4 1.65,0.4, body extent -0.85,-0.45 0.85,0.45, height 0.45
MCHP-QFN-ML28_N [mm] "QFN, 28-Leads, Body 6x6mm, Pitch 0.65mm, Thermal Pad 3.7x3.7mm, IPC Medium Density"
  oval 0.9x0.3 smd: 1(-2.95,1.95) 2(-2.95,1.3) 3(-2.95,0.65) 4(-2.95,0) 5(-2.95,-0.65) 6(-2.95,-1.3) 7(-2.95,-1.95) 15(2.95,-1.95) 16(2.95,-1.3) 17(2.95,-0.65) 18(2.95,0) 19(2.95,0.65) 20(2.95,1.3) 21(2.95,1.95)
  oval 0.3x0.9 smd: 8(-1.95,-2.95) 9(-1.3,-2.95) 10(-0.65,-2.95) 11(0,-2.95) 12(0.65,-2.95) 13(1.3,-2.95) 14(1.95,-2.95) 22(1.95,2.95) 23(1.3,2.95) 24(0.65,2.95) 25(0,2.95) 26(-0.65,2.95) 27(-1.3,2.95) 28(-1.95,2.95)
  rect 3.93x3.93 smd: 29(0,0)
  silkscreen extent -3.92,-3.15 3.15,3.15, body extent -3,-3 3,3, height 1
ONSC-SOD-123FL-2-498-01_V [mm] "SOD, 2-Leads, Body 2.7x1.65mm"
  rect 0.91x1.22 smd: 1(-1.635,0) 2(1.635,0)
  silkscreen extent -1.76,-0.82 0.78,1.29, body extent -1.35,-0.82 1.35,0.82, height 1
PAG0064A_N [mm] "QFP, 64-Leads, Body 10x10mm, Pitch 0.5mm, IPC Medium Density"
  rrect33% 1.45x0.3 smd: 1(-5.725,3.75) 2(-5.725,3.25) 3(-5.725,2.75) 4(-5.725,2.25) 5(-5.725,1.75) 6(-5.725,1.25) 7(-5.725,0.75) 8(-5.725,0.25) 9(-5.725,-0.25) 10(-5.725,-0.75) 11(-5.725,-1.25) 12(-5.725,-1.75) 13(-5.725,-2.25) 14(-5.725,-2.75) 15(-5.725,-3.25) 16(-5.725,-3.75) 33(5.725,-3.75) 34(5.725,-3.25) 35(5.725,-2.75) 36(5.725,-2.25) 37(5.725,-1.75) 38(5.725,-1.25) 39(5.725,-0.75) 40(5.725,-0.25) 41(5.725,0.25) 42(5.725,0.75) 43(5.725,1.25) 44(5.725,1.75) 45(5.725,2.25) 46(5.725,2.75) 47(5.725,3.25) 48(5.725,3.75)
  rrect33% 0.3x1.45 smd: 17(-3.75,-5.725) 18(-3.25,-5.725) 19(-2.75,-5.725) 20(-2.25,-5.725) 21(-1.75,-5.725) 22(-1.25,-5.725) 23(-0.75,-5.725) 24(-0.25,-5.725) 25(0.25,-5.725) 26(0.75,-5.725) 27(1.25,-5.725) 28(1.75,-5.725) 29(2.25,-5.725) 30(2.75,-5.725) 31(3.25,-5.725) 32(3.75,-5.725) 49(3.75,5.725) 50(3.25,5.725) 51(2.75,5.725) 52(2.25,5.725) 53(1.75,5.725) 54(1.25,5.725) 55(0.75,5.725) 56(0.25,5.725) 57(-0.25,5.725) 58(-0.75,5.725) 59(-1.25,5.725) 60(-1.75,5.725) 61(-2.25,5.725) 62(-2.75,5.725) 63(-3.25,5.725) 64(-3.75,5.725)
  silkscreen extent -5.85,-4.6 4.6,4.6, body extent -6,-6 6,6, height 1.09
PTS810 [mm]
  rect 1.05x0.65 smd: 1(0,0) 2(4.15,0) 3(0,-2.15) 4(4.15,-2.15)
  silkscreen extent 1.02,-1.91 3.05,-0.13
RESC0402(1005)_N [mm] "Chip Resistor, Body 1.0x0.5mm, IPC Medium Density"
  rect 0.55x0.65 smd: 1(-0.5,0) 2(0.5,0)
  body extent -0.52,-0.27 0.53,0.28, height 0.4
RESC1005X35X25NL10T10 [mm] "Chip Resistor, 2-Leads, Body 1.00x0.50mm, IPC Medium Density"
  rect 0.65x0.6 smd: 1(-0.425,0) 2(0.425,0)
  body extent -0.55,-0.3 0.55,0.3, height 0.35
RESC1005X40X25NL05T10 [mm] "Chip Resistor, 2-Leads, Body 1.00x0.50mm, IPC Medium Density"
  rect 0.6x0.55 smd: 1(-0.425,0) 2(0.425,0)
  body extent -0.53,-0.27 0.53,0.28, height 0.4
RESC1609X55X30NL15T15 [mm] "Chip Resistor, 2-Leads, Body 1.75x0.95mm, IPC Medium Density"
  rect 0.95x0.95 smd: 1(-0.75,0) 2(0.75,0)
  body extent -0.87,-0.47 0.87,0.48, height 0.55
STM-LGA-16 [mm] "LGA, 16-Leads, Body 3x3mm, Pitch 0.5mm"
  rect 0.35x0.25 smd: 1(-1.225,1) 2(-1.225,0.5) 3(-1.225,0) 4(-1.225,-0.5) 5(-1.225,-1) 9(1.225,-1) 10(1.225,-0.5) 11(1.225,0) 12(1.225,0.5) 13(1.225,1)
  rect 0.25x0.35 smd: 6(-0.5,-1.225) 7(0,-1.225) 8(0.5,-1.225) 14(0.5,1.225) 15(0,1.225) 16(-0.5,1.225)
  silkscreen extent -1.85,-1.57 1.58,1.58, body extent -1.5,-1.5 1.5,1.5, height 1
YAG_CC0402 [mil]
  rect 26x22 smd paste+0 mask+0: 1(-21.5,0) 2(21.5,0)
  body extent -21,-11 21,11, height 22
ZIF_18S [mm]
  rect 0.3x0.8 smd: 1(9.5,0) 2(9,0) 3(8.5,0) 4(8,0) 5(7.5,0) 6(7,0) 7(6.5,0) 8(6,0) 9(5.5,0) 10(5,0) 11(4.5,0) 12(4,0) 13(3.5,0) 14(3,0) 15(2.5,0) 16(2,0) 17(1.5,0) 18(1,0)
  rect 0.4x0.8 smd: MP1(10.5,-2.5) MP2(0,-2.5)
  silkscreen extent -0.75,-3.25 11.25,0

## Part data
BATT1: Manufacturer 1=JST, Supplier Part Number 1=455-1749-1-ND, Manufacturer Part Number 1=S2B-PH-SM4-TB(LF)(SN), Pricing 1="1=0.58000, 10=0.54700, 100=0.41940, 500=0.36470 (USD)", RoHS=No, Stock 1=99373, Supplier 1=Digi-Key
C1 C8 C25 C29 C31 C33 C37 C43 C46: "CAP CER 10UF 4V X6S 0603", Capacitance=10uF, Case/Package=0603, Case Code (Metric)=1608, Dielectric=X6S, Manufacturer 1=Murata, Max Operating Temperature=105°C, Min Operating Temperature=-55°C, Package Quantity=4000, Supplier Part Number 1=490-10469-1-ND, Tolerance=10%, Voltage Rating=4V, Case Code (Imperial)=0603, ComponentLink1Description=http://www.mouser.com/ds/2/281/c02e-2905.pdf?src-supplier=Mouser, ComponentLink1URL=http://www.mouser.com/ds/2/281/c02e-2905.pdf?src-supplier=Mouser, ComponentLink2Description=http://search.murata.co.jp/Ceramy/image/img/A01X/G101/ENG/GRM188C80G106KE47-01.pdf?src-supplier=Digi-Key, ComponentLink2URL=http://search.murata.co.jp/Ceramy/image/img/A01X/G101/ENG/GRM188C80G106KE47-01.pdf?src-supplier=Digi-Key, Height=0.8mm, Length=0.063inch, Manufacturer Part Number 1=GRM188C80G106KE47D, Mount="Surface Mount", Packaging="Tape and Reel", Pricing 1="1=0.17000, 10=0.11800, 100=0.05990, 500=0.04098, 1000=0.03625 (USD)", RoHS=Yes, Stock 1=203819, Supplier 1=Digi-Key, Termination=SMD/SMT, Thickness=0.035inch, Voltage Rating (DC)=4V, Weight=0.000222oz, Width=0.031inch
C2 C4 C44 C45: "MURATA - GRM31CR60J107ME39K - COND, 100µF, 6.3V, 20%, X5R, 1206", Capacitance=100uF, Case/Package=1206, Case Code (Metric)=3216, Dielectric=X5R, Manufacturer 1=Murata, Max Operating Temperature=85°C, Min Operating Temperature=-55°C, Package Quantity=1, Supplier Part Number 1=490-7217-1-ND, Tolerance=20%, Voltage=6.3V, Case Code (Imperial)=1206, ComponentLink1Description=https://datasheet.ciiva.com/13246/product-13246228.pdf?src-supplier=Mouser, ComponentLink1URL=https://datasheet.ciiva.com/13246/product-13246228.pdf?src-supplier=Mouser, ComponentLink2Description=https://datasheet.ciiva.com/18697/grm31cr60j107me39-01-18697367.pdf?src-supplier=Digi-Key, ComponentLink2URL=https://datasheet.ciiva.com/18697/grm31cr60j107me39-01-18697367.pdf?src-supplier=Digi-Key, ComponentLink3Description=https://datasheet.ciiva.com/18697/grm31cr60j107me39-01-18697368.pdf?src-supplier=Digi-Key, ComponentLink3URL=https://datasheet.ciiva.com/18697/grm31cr60j107me39-01-18697368.pdf?src-supplier=Digi-Key, ComponentLink4Description=https://datasheet.ciiva.com/18697/grm31cr60j107me39-01-18697369.pdf?src-supplier=Digi-Key, ComponentLink4URL=https://datasheet.ciiva.com/18697/grm31cr60j107me39-01-18697369.pdf?src-supplier=Digi-Key, Depth=1.6mm, Height=1.6mm, Lead Free="Lead Free", Length=3.2mm, Manufacturer Part Number 1=GRM31CR60J107ME39K, Mount="Surface Mount", Packaging="Tape and Reel", Pricing 1="1=0.98000, 10=0.77400, 100=0.58060, 500=0.43870, 1000=0.38709, 2500=0.36128 (USD)", Radiation Hardening=No, REACH SVHC="No SVHC", RoHS=Yes, Stock 1=407390, Supplier 1=Digi-Key, Termination=SMD/SMT, Thickness=0.071inch, Voltage Rating=6.3V, Voltage Rating (DC)=6.3V, Width=0.063inch
C3 C9 C11 C26 C34 C63 C64 C65 C66: "CAP ARRAY 1000PF 50V X7R 0612", Capacitance=1nF, Case/Package=0612, Case Code (Metric)=1632, Dielectric=X7R, Dielectric Material=Ceramic, Manufacturer 1=KEMET, Max Operating Temperature=125°C, Min Operating Temperature=-55°C, Number of Capacitors=4, Package Quantity=4000, Supplier Part Number 1=399-9415-1-ND, Tolerance=10%, Voltage Rating=50V, Case Code (Imperial)=0612, Circuit Type=Isolated, ComponentLink1Description=http://www.farnell.com/datasheets/1868478.pdf?src-supplier=Farnell, ComponentLink1URL=http://www.farnell.com/datasheets/1868478.pdf?src-supplier=Farnell, ComponentLink2Description=https://media.digikey.com/pdf/Data%20Sheets/Kemet%20PDFs/X7R_Dielectric_10-200V_Rev_Nov2013.pdf?src-supplier=Digi-Key, ComponentLink2URL=https://media.digikey.com/pdf/Data%20Sheets/Kemet%20PDFs/X7R_Dielectric_10-200V_Rev_Nov2013.pdf?src-supplier=Digi-Key, ComponentLink3Description=http://www.mouser.com/ds/2/212/KEM_C1017_X7R_ARRAY_SMD-1102778.pdf?src-supplier=Mouser, ComponentLink3URL=http://www.mouser.com/ds/2/212/KEM_C1017_X7R_ARRAY_SMD-1102778.pdf?src-supplier=Mouser, ComponentLink4Description=http://www.farnell.com/datasheets/1868478.pdf?src-supplier=Element14, ComponentLink4URL=http://www.farnell.com/datasheets/1868478.pdf?src-supplier=Element14, ComponentLink5Description=http://capacitoredge.kemet.com/capedge2/DataSheet/Datasheet-CA064C102K5RACTU.pdf?pn=CA064C102K5RACTU&src-supplier=Avnet, ComponentLink5URL=http://capacitoredge.kemet.com/capedge2/DataSheet/Datasheet-CA064C102K5RACTU.pdf?pn=CA064C102K5RACTU&src-supplier=Avnet, ComponentLink6Description=http://capacitoredge.kemet.com/capedge2/DataSheet/Datasheet-CA064C102K5RACTU.pdf?pn=CA064C102K5RACTU&src-supplier=Avnet+Asia, ComponentLink6URL=http://capacitoredge.kemet.com/capedge2/DataSheet/Datasheet-CA064C102K5RACTU.pdf?pn=CA064C102K5RACTU&src-supplier=Avnet+Asia, Contact Plating=Tin,Matte, Height=0.8mm, Height - Seated (Max)=0.035inch, Lead Free="Lead Free", Length=0.063inch, Manufacturer Part Number 1=CA064C102K5RACTU, Mount="Surface Mount", Number of Circuits=4, Number of Elements=4, Number of Terminals=8, Packaging="Tape and Reel", Pricing 1="1=0.61000, 10=0.42800, 100=0.28180, 500=0.20874, 1000=0.17743 (USD)", REACH SVHC="No SVHC", RoHS=Yes, Stock 1=12, Supplier 1=Digi-Key, Terminal Pitch=0.8mm, Termination=SMD/SMT, Voltage Rating (DC)=50V, Width=1.6mm
C5 C10 C12 C13 C15 C24 C28 C41 C47 C51: "CAP CER 0.1UF 16V X7R 0402", Capacitance=100nF, Case/Package=0402, Case Code (Metric)=1005, Dielectric=X7R, Manufacturer 1=Yageo, Max Operating Temperature=125°C, Min Operating Temperature=-55°C, Package Quantity=1, Supplier Part Number 1=311-1338-1-ND, Tolerance=10%, Voltage=16V, Case Code (Imperial)=0402, ComponentLink1Description=https://datasheet.ciiva.com/11788/0900766b80ce67ed-11788364.pdf?src-supplier=RSComponents, ComponentLink1URL=https://datasheet.ciiva.com/11788/0900766b80ce67ed-11788364.pdf?src-supplier=RSComponents, ComponentLink2Description=https://datasheet.ciiva.com/16625/upy-gphc-x7r-6-3v-to-50v-8-16625511.pdf?src-supplier=Avnet+Europe, ComponentLink2URL=https://datasheet.ciiva.com/16625/upy-gphc-x7r-6-3v-to-50v-8-16625511.pdf?src-supplier=Avnet+Europe, ComponentLink3Description=https://datasheet.ciiva.com/161/mlccorderingcode-161544.pdf?src-supplier=Digi-Key, ComponentLink3URL=https://datasheet.ciiva.com/161/mlccorderingcode-161544.pdf?src-supplier=Digi-Key, ComponentLink4Description=https://datasheet.ciiva.com/161/mlccorderingcode-161545.pdf?src-supplier=Digi-Key, ComponentLink4URL=https://datasheet.ciiva.com/161/mlccorderingcode-161545.pdf?src-supplier=Digi-Key, ComponentLink5Description=https://datasheet.ciiva.com/8033/1734573-8033661.pdf?src-supplier=Element14, ComponentLink5URL=https://datasheet.ciiva.com/8033/1734573-8033661.pdf?src-supplier=Element14, ComponentLink6Description=https://datasheet.ciiva.com/7978/1489800-7978111.pdf?src-supplier=Element14, ComponentLink6URL=https://datasheet.ciiva.com/7978/1489800-7978111.pdf?src-supplier=Element14, ComponentLink7Description=https://datasheet.ciiva.com/8033/1734573-8033663.pdf?src-supplier=Element14, ComponentLink7URL=https://datasheet.ciiva.com/8033/1734573-8033663.pdf?src-supplier=Element14, ComponentLink8Description=https://datasheet.ciiva.com/11587/upy-gphc-x7r-6-3v-to-50v-8-11587305.pdf?src-supplier=Avnet, ComponentLink8URL=https://datasheet.ciiva.com/11587/upy-gphc-x7r-6-3v-to-50v-8-11587305.pdf?src-supplier=Avnet, ComponentLink9Description=https://datasheet.ciiva.com/161/mlccorderingcode-161546.pdf?src-supplier=Digi-Key, ComponentLink9URL=https://datasheet.ciiva.com/161/mlccorderingcode-161546.pdf?src-supplier=Digi-Key, ComponentLink10Description=https://datasheet.ciiva.com/13395/upy-gphc-x7r-6-3v-to-50v-8-13395676.pdf?src-supplier=Mouser, ComponentLink10URL=https://datasheet.ciiva.com/13395/upy-gphc-x7r-6-3v-to-50v-8-13395676.pdf?src-supplier=Mouser, ComponentLink11Description=https://datasheet.ciiva.com/28450/1489800-28450335.pdf?src-supplier=Element14, ComponentLink11URL=https://datasheet.ciiva.com/28450/1489800-28450335.pdf?src-supplier=Element14, Composition=Ceramic, Depth=0.5mm, Halogen Free="Halogen Free", Height=0.5mm, Lead Free="Lead Free", Length=1mm, Manufacturer Part Number 1=CC0402KRX7R7BB104, Mount="Surface Mount", Number of Pins=2, Packaging="Tape and Reel", Pricing 1="1=0.10000, 10=0.03200, 100=0.01420, 500=0.01014, 1000=0.00797, 2500=0.00724, 5000=0.00667 (USD)", Radiation Hardening=No, REACH SVHC="No SVHC", RoHS=Yes, Stock 1=30032352, Supplier 1=Digi-Key, Termination=SMD/SMT, Thickness=0.022inch, Voltage Rating=16V, Voltage Rating (DC)=16V, Width=0.02inch
C6 C7 C14 C17 C18 C19 C21 C22 C27 C42 C54 C55 C58 C59 C60: "CAP CER 1UF 6.3V X7R 0402", Capacitance=1uF, Case/Package=0402, Case Code (Metric)=1005, Dielectric=X7R, Manufacturer 1=Murata, Max Operating Temperature=125°C, Min Operating Temperature=-55°C, Package Quantity=50000, Supplier Part Number 1=490-13339-1-ND, Tolerance=10%, Voltage Rating=6.3V, Case Code (Imperial)=0402, ComponentLink1Description=http://www.mouser.com/ds/2/281/c02e-2905.pdf?src-supplier=Mouser, ComponentLink1URL=http://www.mouser.com/ds/2/281/c02e-2905.pdf?src-supplier=Mouser, ComponentLink2Description=http://search.murata.co.jp/Ceramy/image/img/A01X/G101/ENG/GRM155R70J105KA12-01.pdf?src-supplier=Digi-Key, ComponentLink2URL=http://search.murata.co.jp/Ceramy/image/img/A01X/G101/ENG/GRM155R70J105KA12-01.pdf?src-supplier=Digi-Key, Length=0.039inch, Manufacturer Part Number 1=GRM155R70J105KA12J, Mount="Surface Mount", Packaging="Tape and Reel", Pricing 1="1=0.11000, 10=0.07900, 100=0.03700, 500=0.02596, 1000=0.02149, 2500=0.02000, 5000=0.01830 (USD)", RoHS=Yes, Stock 1=3268614, Supplier 1=Digi-Key, Termination=SMD/SMT, Thickness=0.022inch, Voltage Rating (DC)=6.3V, Weight=0.000212oz, Width=0.02inch
C16 C53: "CAP CER 1000PF 16V X7R 0402", Capacitance=1nF, Case/Package=0402, Case Code (Metric)=1005, Dielectric=X7R, Manufacturer 1=Yageo, Max Operating Temperature=125°C, Min Operating Temperature=-55°C, Package Quantity=1, Supplier Part Number 1=311-1352-1-ND, Tolerance=10%, Voltage Rating=16V, Case Code (Imperial)=0402, ComponentLink1Description=https://datasheet.ciiva.com/143/mlccorderingcode-143963.pdf?src-supplier=Digi-Key, ComponentLink1URL=https://datasheet.ciiva.com/143/mlccorderingcode-143963.pdf?src-supplier=Digi-Key, ComponentLink2Description=https://datasheet.ciiva.com/26862/getdatasheetpartid-698313-26862635.pdf?src-supplier=Verical, ComponentLink2URL=https://datasheet.ciiva.com/26862/getdatasheetpartid-698313-26862635.pdf?src-supplier=Verical, ComponentLink3Description=https://datasheet.ciiva.com/143/mlccorderingcode-143964.pdf?src-supplier=Digi-Key, ComponentLink3URL=https://datasheet.ciiva.com/143/mlccorderingcode-143964.pdf?src-supplier=Digi-Key, ComponentLink4Description=https://datasheet.ciiva.com/17437/upy-gphc-x7r-6-3v-to-50v-8-17437337.pdf?src-supplier=Avnet+Europe, ComponentLink4URL=https://datasheet.ciiva.com/17437/upy-gphc-x7r-6-3v-to-50v-8-17437337.pdf?src-supplier=Avnet+Europe, ComponentLink5Description=https://datasheet.ciiva.com/143/mlccorderingcode-143962.pdf?src-supplier=Digi-Key, ComponentLink5URL=https://datasheet.ciiva.com/143/mlccorderingcode-143962.pdf?src-supplier=Digi-Key, ComponentLink6Description=https://datasheet.ciiva.com/7978/1489800-7978107.pdf?src-supplier=Element14, ComponentLink6URL=https://datasheet.ciiva.com/7978/1489800-7978107.pdf?src-supplier=Element14, ComponentLink7Description=https://datasheet.ciiva.com/11464/upy-gphc-x7r-6-3v-to-50v-8-11464876.pdf?src-supplier=Avnet, ComponentLink7URL=https://datasheet.ciiva.com/11464/upy-gphc-x7r-6-3v-to-50v-8-11464876.pdf?src-supplier=Avnet, Composition=Ceramic, Depth=0.5mm, Halogen Free="Halogen Free", Height=0.5mm, Lead Free="Lead Free", Length=1mm, Manufacturer Part Number 1=CC0402KRX7R7BB102, Mount="Surface Mount", Packaging="Tape and Reel", Pricing 1="1=0.10000, 10=0.02000, 100=0.00910, 500=0.00646, 1000=0.00508, 2500=0.00462, 5000=0.00425 (USD)", Radiation Hardening=No, REACH SVHC="No SVHC", RoHS=Yes, Stock 1=319318, Supplier 1=Digi-Key, Termination=SMD/SMT, Thickness=0.022inch, Voltage Rating (DC)=16V, Width=0.5mm
C20 C23: "CAP CER 18PF 50V C0G/NPO 0402", Capacitance=18pF, Case/Package=0402, Case Code (Metric)=1005, Dielectric=C0G, Manufacturer 1=Yageo, Max Operating Temperature=125°C, Min Operating Temperature=-55°C, Package Quantity=1, Supplier Part Number 1=311-1415-1-ND, Temperature Coefficient=30ppm/°C, Tolerance=5%, Voltage=50V, Case Code (Imperial)=0402, ComponentLink1Description=https://datasheet.ciiva.com/11788/0900766b80d84fbf-11788369.pdf?src-supplier=RSComponents, ComponentLink1URL=https://datasheet.ciiva.com/11788/0900766b80d84fbf-11788369.pdf?src-supplier=RSComponents, ComponentLink2Description=https://datasheet.ciiva.com/176/mlccorderingcode-176357.pdf?src-supplier=Digi-Key, ComponentLink2URL=https://datasheet.ciiva.com/176/mlccorderingcode-176357.pdf?src-supplier=Digi-Key, ComponentLink3Description=https://datasheet.ciiva.com/176/mlccorderingcode-176358.pdf?src-supplier=Digi-Key, ComponentLink3URL=https://datasheet.ciiva.com/176/mlccorderingcode-176358.pdf?src-supplier=Digi-Key, ComponentLink4Description=https://datasheet.ciiva.com/176/mlccorderingcode-176359.pdf?src-supplier=Digi-Key, ComponentLink4URL=https://datasheet.ciiva.com/176/mlccorderingcode-176359.pdf?src-supplier=Digi-Key, ComponentLink5Description=https://datasheet.ciiva.com/28450/1443161-28450232.pdf?src-supplier=Element14, ComponentLink5URL=https://datasheet.ciiva.com/28450/1443161-28450232.pdf?src-supplier=Element14, ComponentLink6Description=https://datasheet.ciiva.com/13208/upy-gp-np0-16v-to-50v-8-13208430.pdf?src-supplier=Mouser, ComponentLink6URL=https://datasheet.ciiva.com/13208/upy-gp-np0-16v-to-50v-8-13208430.pdf?src-supplier=Mouser, ComponentLink7Description=https://datasheet.ciiva.com/11587/upy-gp-np0-16v-to-50v-8-11587087.pdf?src-supplier=Avnet, ComponentLink7URL=https://datasheet.ciiva.com/11587/upy-gp-np0-16v-to-50v-8-11587087.pdf?src-supplier=Avnet, Composition=Ceramic, Depth=0.5mm, Height=0.5mm, Lead Free="Lead Free", Length=1mm, Manufacturer Part Number 1=CC0402JRNPO9BN180, Mount="Surface Mount", Number of Pins=2, Packaging="Tape and Reel", Pricing 1="1=0.10000, 10=0.02400, 100=0.01070, 500=0.00764, 1000=0.00601, 2500=0.00546, 5000=0.00502 (USD)", Radiation Hardening=No, REACH SVHC="No SVHC", RoHS=Yes, Stock 1=852660, Supplier 1=Digi-Key, Termination=SMD/SMT, Thickness=0.022inch, Voltage Rating=50V, Voltage Rating (DC)=50V, Weight=2.3E-05oz, Width=0.02inch
C30: "CAP CER 10000PF 16V X7R 0402", Capacitance=10nF, Case/Package=0402, Case Code (Metric)=1005, Dielectric=X7R, Insulation Resistance=10GR, Manufacturer 1=Yageo, Max Operating Temperature=125°C, Min Operating Temperature=-55°C, Package Quantity=1, Supplier Part Number 1=311-1042-1-ND, Tolerance=10%, Voltage=16V, Case Code (Imperial)=0402, ComponentLink1Description=https://datasheet.ciiva.com/143/upy-gphc-x7r-6-3v-to-50v-8-143952.pdf?src-supplier=Digi-Key, ComponentLink1URL=https://datasheet.ciiva.com/143/upy-gphc-x7r-6-3v-to-50v-8-143952.pdf?src-supplier=Digi-Key, ComponentLink2Description=https://datasheet.ciiva.com/143/mlccorderingcode-143950.pdf?src-supplier=Digi-Key, ComponentLink2URL=https://datasheet.ciiva.com/143/mlccorderingcode-143950.pdf?src-supplier=Digi-Key, ComponentLink3Description=https://datasheet.ciiva.com/143/mlccorderingcode-143951.pdf?src-supplier=Digi-Key, ComponentLink3URL=https://datasheet.ciiva.com/143/mlccorderingcode-143951.pdf?src-supplier=Digi-Key, ComponentLink4Description=https://datasheet.ciiva.com/16625/upy-gphc-x7r-6-3v-to-50v-8-16625510.pdf?src-supplier=Avnet+Europe, ComponentLink4URL=https://datasheet.ciiva.com/16625/upy-gphc-x7r-6-3v-to-50v-8-16625510.pdf?src-supplier=Avnet+Europe, ComponentLink5Description=https://datasheet.ciiva.com/8033/70765-8033655.pdf?src-supplier=Element14, ComponentLink5URL=https://datasheet.ciiva.com/8033/70765-8033655.pdf?src-supplier=Element14, ComponentLink6Description=https://datasheet.ciiva.com/8033/1489800-8033658.pdf?src-supplier=Element14, ComponentLink6URL=https://datasheet.ciiva.com/8033/1489800-8033658.pdf?src-supplier=Element14, ComponentLink7Description=https://datasheet.ciiva.com/28450/1489800-28450330.pdf?src-supplier=Element14, ComponentLink7URL=https://datasheet.ciiva.com/28450/1489800-28450330.pdf?src-supplier=Element14, ComponentLink8Description=https://datasheet.ciiva.com/8033/1489800-8033659.pdf?src-supplier=Element14, ComponentLink8URL=https://datasheet.ciiva.com/8033/1489800-8033659.pdf?src-supplier=Element14, ComponentLink9Description=https://datasheet.ciiva.com/7978/1489800-7978109.pdf?src-supplier=Element14, ComponentLink9URL=https://datasheet.ciiva.com/7978/1489800-7978109.pdf?src-supplier=Element14, ComponentLink10Description=https://datasheet.ciiva.com/5425/upy-gp-np0-16v-to-50v-8-3714-5425438.pdf?src-supplier=Mouser, ComponentLink10URL=https://datasheet.ciiva.com/5425/upy-gp-np0-16v-to-50v-8-3714-5425438.pdf?src-supplier=Mouser, Depth=0.5mm, Dissipation Factor=3.5%, Halogen Free="Halogen Free", Height=0.5mm, Lead Free="Lead Free", Length=1mm, Manufacturer Part Number 1=CC0402KRX7R7BB103, Mount="Surface Mount", Number of Pins=2, Packaging="Tape and Reel", Pricing 1="1=0.10000, 10=0.01900, 100=0.00850, 500=0.00610, 1000=0.00479, 2500=0.00436, 5000=0.00401 (USD)", Radiation Hardening=No, REACH SVHC="No SVHC", RoHS=Yes, Stock 1=1055821, Supplier 1=Digi-Key, Termination=SMD/SMT, Thickness=0.022inch, Voltage Rating=16V, Voltage Rating (DC)=16V, Width=0.02inch
C32 C35 C36 C38: "0402 6.3 V 2.2 uF ±20% Tolerance X6S Monolithic Ceramic Chip Capacitor", Capacitance=2.2uF, Case/Package=0402, Case Code (Metric)=1005, Dielectric=X6S, Manufacturer 1=Murata, Max Operating Temperature=105°C, Min Operating Temperature=-55°C, Package Quantity=10000, Supplier Part Number 1=490-10013-1-ND, Tolerance=20%, Voltage Rating=6.3V, Case Code (Imperial)=0402, ComponentLink1Description=http://www.mouser.com/ds/2/281/c02e-2905.pdf?src-supplier=Mouser, ComponentLink1URL=http://www.mouser.com/ds/2/281/c02e-2905.pdf?src-supplier=Mouser, ComponentLink2Description=http://search.murata.co.jp/Ceramy/image/img/A01X/partnumbering_e_01.pdf?src-supplier=Digi-Key, ComponentLink2URL=http://search.murata.co.jp/Ceramy/image/img/A01X/partnumbering_e_01.pdf?src-supplier=Digi-Key, Height=0.5mm, Length=0.039inch, Manufacturer Part Number 1=GRM155C80J225ME95D, Mount="Surface Mount", Packaging="Tape and Reel", Pricing 1="1=0.12000, 10=0.08200, 100=0.03850, 500=0.02702, 1000=0.02237, 2500=0.02082, 5000=0.01905 (USD)", RoHS=Yes, Stock 1=46738, Supplier 1=Digi-Key, Termination=SMD/SMT, Thickness=0.022inch, Voltage Rating (DC)=6.3V, Weight=0.000212oz, Width=0.5mm
CONN1: "CONN MICRO SD CARD PUSH-PUSH R/A", Current Rating=500mA, Flammability Rating="UL94 V-0", Manufacturer 1=Hirose, Max Operating Temperature=85°C, Max Voltage Rating (AC)=125V, Min Operating Temperature=-25°C, Package Quantity=1, Supplier Part Number 1=HR1964CT-ND, ComponentLink1Description=https://datasheet.ciiva.com/683/e60900232-683393.pdf?src-supplier=Digi-Key, ComponentLink1URL=https://datasheet.ciiva.com/683/e60900232-683393.pdf?src-supplier=Digi-Key, ComponentLink2Description=https://datasheet.ciiva.com/683/e60900232-683394.pdf?src-supplier=Digi-Key, ComponentLink2URL=https://datasheet.ciiva.com/683/e60900232-683394.pdf?src-supplier=Digi-Key, ComponentLink3Description=https://datasheet.ciiva.com/683/e60900232-683395.pdf?src-supplier=Digi-Key, ComponentLink3URL=https://datasheet.ciiva.com/683/e60900232-683395.pdf?src-supplier=Digi-Key, ComponentLink4Description=https://datasheet.ciiva.com/46418/1697167-46418261.pdf?src-supplier=Element14, ComponentLink4URL=https://datasheet.ciiva.com/46418/1697167-46418261.pdf?src-supplier=Element14, ComponentLink5Description=https://datasheet.ciiva.com/3122/e60900232-3122534.pdf?src-supplier=Avnet, ComponentLink5URL=https://datasheet.ciiva.com/3122/e60900232-3122534.pdf?src-supplier=Avnet, ComponentLink6Description=https://datasheet.ciiva.com/46418/1697167-46418262.pdf?src-supplier=Element14, ComponentLink6URL=https://datasheet.ciiva.com/46418/1697167-46418262.pdf?src-supplier=Element14, ComponentLink7Description=https://datasheet.ciiva.com/16205/e60900232-16205727.pdf?src-supplier=Future+Electronics, ComponentLink7URL=https://datasheet.ciiva.com/16205/e60900232-16205727.pdf?src-supplier=Future+Electronics, Connector Type=Connector, Contact Material="Copper Alloy", Contact Plating=Gold, Depth=15.95mm, Gender=Female, Height=1.68mm, Housing Material=Polymer, Lead Free="Lead Free", Length=15.95mm, Manufacturer Part Number 1=DM3AT-SF-PEJM5, Max Current Rating=500mA, Mount="Surface Mount,Standard", Number of Contacts=8, Number of Positions=8, Number of Rows=1, Orientation="Right Angle", Packaging="Tape and Reel", Pitch=1.1mm, Pricing 1="1=2.67000, 10=2.56100, 25=2.34760, 50=2.24080, 100=2.13400, 250=1.86724, 500=1.81390 (USD)", Radiation Hardening=No, REACH SVHC="No SVHC", RoHS=Yes, Stock 1=21659, Supplier 1=Digi-Key, Termination=SMD/SMT, Voltage Rating=125V, Width=13.85mm
D1 D12 D13: "LED BLUE CLEAR CHIP SMD", Case/Package=0603, Case Code (Metric)=1608, Color=Blue, Forward Current=20mA, Forward Voltage=2.8V, Lens Color=Colorless, Manufacturer 1="Vishay Lite-On", Max Operating Temperature=80°C, Min Operating Temperature=-20°C, Package Quantity=1, Power Dissipation=76mW, Reverse Voltage=5V, Supplier Part Number 1=160-1827-1-ND, Test Current=5mA, Case Code (Imperial)=0603, ComponentLink1Description=https://datasheet.ciiva.com/4688/lite-on-ltst-c193tbkt-5a-187386-4688832.pdf?src-supplier=Mouser, ComponentLink1URL=https://datasheet.ciiva.com/4688/lite-on-ltst-c193tbkt-5a-187386-4688832.pdf?src-supplier=Mouser, ComponentLink2Description=https://datasheet.ciiva.com/2111/ltst-c193tbkt-5a-2111219.pdf?src-supplier=Digi-Key, ComponentLink2URL=https://datasheet.ciiva.com/2111/ltst-c193tbkt-5a-2111219.pdf?src-supplier=Digi-Key, ComponentLink3Description=https://datasheet.ciiva.com/15201/getdatasheetpartid-293056-15201395.pdf?src-supplier=Verical, ComponentLink3URL=https://datasheet.ciiva.com/15201/getdatasheetpartid-293056-15201395.pdf?src-supplier=Verical, ComponentLink4Description=https://datasheet.ciiva.com/11773/0900766b80dc0554-11773880.pdf?src-supplier=RSComponents, ComponentLink4URL=https://datasheet.ciiva.com/11773/0900766b80dc0554-11773880.pdf?src-supplier=RSComponents, ComponentLink5Description=https://datasheet.ciiva.com/16210/ltst-c193tbkt-5a-16210824.pdf?src-supplier=Future+Electronics, ComponentLink5URL=https://datasheet.ciiva.com/16210/ltst-c193tbkt-5a-16210824.pdf?src-supplier=Future+Electronics, ComponentLink6Description=https://datasheet.ciiva.com/2111/p-100-ltst-c193tbkt-5a-2111220.pdf?src-supplier=Digi-Key, ComponentLink6URL=https://datasheet.ciiva.com/2111/p-100-ltst-c193tbkt-5a-2111220.pdf?src-supplier=Digi-Key, ComponentLink7Description=https://datasheet.ciiva.com/2111/p-100-ltst-c193tbkt-5a-2111221.pdf?src-supplier=Digi-Key, ComponentLink7URL=https://datasheet.ciiva.com/2111/p-100-ltst-c193tbkt-5a-2111221.pdf?src-supplier=Digi-Key, Depth=0.8mm, Dominant Wavelength=475nm, Height=0.35mm, Illumination Color=Blue, Lead Free="Lead Free", Length=1.6mm, Lens Style=Diffused,Colorless,Rectangular,Clear, Lens Transparency=Clear, Luminous Intensity=15mcd, Manufacturer Part Number 1=LTST-C193TBKT-5A, Mount="Surface Mount", Number of Elements=1, Number of LEDs=1, Number of Pins=2, Packaging="Tape and Reel", Pricing 1="1=0.45000, 10=0.32000, 100=0.14240, 500=0.09968, 1000=0.08188, 2500=0.07120 (USD)", Radiation Hardening=No, RoHS=Yes, Stock 1=141970, Supplier 1=Digi-Key, Viewing Angle=130°, Width=0.8mm
D2 D3 D4 D5 D6 D7 D15 D16 D17 D18: "TVS DIODE 5.5VWM 14.5VC SC70-6", Breakdown Voltage=7V, Capacitance=1pF, Case/Package=SC, Clamping Voltage=14.5V, Manufacturer 1="Texas Instruments", Max Operating Temperature=125°C, Max Power Dissipation=45W, Max Reverse Leakage Current=500pA, Min Operating Temperature=-40°C, Operating Supply Voltage=5.5V, Package Quantity=3000, Peak Pulse Current=3A, Power Line Protection=No, Supplier Part Number 1=296-39346-1-ND, Test Current=1mA, ComponentLink1Description=https://datasheet.ciiva.com/12545/tpd4e1b06-224687-12545147.pdf?src-supplier=Mouser, ComponentLink1URL=https://datasheet.ciiva.com/12545/tpd4e1b06-224687-12545147.pdf?src-supplier=Mouser, ComponentLink2Description=https://datasheet.ciiva.com/6574/tpd4e1b06-6574671.pdf?src-supplier=Digi-Key, ComponentLink2URL=https://datasheet.ciiva.com/6574/tpd4e1b06-6574671.pdf?src-supplier=Digi-Key, Direction=Bidirectional,Unidirectional, ESD Protection=Yes, Height=1mm, Interface=LVDS,USB, Lead Free="Lead Free", Length=2.15mm, Manufacturer Part Number 1=TPD4E1B06DCKR, Min Breakdown Voltage=7V, Mount="Surface Mount", Number of Bidirectional Channels=4, Number of Channels=4, Number of Pins=6, Packaging="Tape and Reel", Peak Pulse Power=45W, Polarity=Bidirectional, Pricing 1="1=0.58000, 10=0.49400, 100=0.36920, 500=0.29004, 1000=0.22413 (USD)", REACH SVHC="No SVHC", Reverse Standoff Voltage=5.5V, RoHS=Yes, Stock 1=27694, Supplier 1=Digi-Key, Termination=SMD/SMT, Width=1.4mm, Working Voltage=5.5V
D8: "DIODE GEN PURP 80V 100MA 0603", Average Rectified Current=100mA, Case/Package=SMD/SMT, Manufacturer 1=Comchip, Max Power Dissipation=150mW, Max Reverse Leakage Current=100nA, Max Reverse Voltage (DC)=80V, Max Surge Current=1A, Package Quantity=1, Supplier Part Number 1=641-1003-1-ND, ComponentLink1Description=https://datasheet.ciiva.com/911/cdsu400b-revb370614-911825.pdf?src-supplier=Digi-Key, ComponentLink1URL=https://datasheet.ciiva.com/911/cdsu400b-revb370614-911825.pdf?src-supplier=Digi-Key, ComponentLink2Description=https://datasheet.ciiva.com/4435/cdsu400b-revb370614-56727-4435278.pdf?src-supplier=Mouser, ComponentLink2URL=https://datasheet.ciiva.com/4435/cdsu400b-revb370614-56727-4435278.pdf?src-supplier=Mouser, ComponentLink3Description=https://datasheet.ciiva.com/911/cdsu400b-revb370614-911826.pdf?src-supplier=Digi-Key, ComponentLink3URL=https://datasheet.ciiva.com/911/cdsu400b-revb370614-911826.pdf?src-supplier=Digi-Key, ComponentLink4Description=https://datasheet.ciiva.com/911/cdsu400b-revb370614-911827.pdf?src-supplier=Digi-Key, ComponentLink4URL=https://datasheet.ciiva.com/911/cdsu400b-revb370614-911827.pdf?src-supplier=Digi-Key, Manufacturer Part Number 1=CDSU400B, Mount="Surface Mount", Packaging="Tape and Reel", Pricing 1="1=0.22000, 10=0.17700, 100=0.09390, 500=0.06180, 1000=0.04202 (USD)", Recovery Time=4ns, Reverse Recovery Time=4ns, RoHS=Yes, Stock 1=61022, Supplier 1=Digi-Key
D11: "MBR120VLSF Series 20 V 1 A Surface Mount Schottky Power Rectifier - SOD-123FL", Average Rectified Current=1A, Forward Voltage=340mV, Manufacturer 1="ON Semiconductor", Max Forward Surge Current (Ifsm)=45A, Max Operating Temperature=125°C, Max Repetitive Reverse Voltage (Vrrm)=20V, Max Reverse Leakage Current=600uA, Min Operating Temperature=-65°C, Package Quantity=10000, Supplier Part Number 1=MBR120VLSFT3GOSCT-ND, ComponentLink1Description=https://datasheet.ciiva.com/4715/mbr120vlsft1-d-107081-4715104.pdf?src-supplier=Mouser, ComponentLink1URL=https://datasheet.ciiva.com/4715/mbr120vlsft1-d-107081-4715104.pdf?src-supplier=Mouser, ComponentLink2Description=https://datasheet.ciiva.com/6380/mbr120vlsft1-d-6380907.pdf?src-supplier=Digi-Key, ComponentLink2URL=https://datasheet.ciiva.com/6380/mbr120vlsft1-d-6380907.pdf?src-supplier=Digi-Key, ComponentLink3Description=https://datasheet.ciiva.com/8294/mbr120vlsft1-d-8294603.pdf?src-supplier=Avnet, ComponentLink3URL=https://datasheet.ciiva.com/8294/mbr120vlsft1-d-8294603.pdf?src-supplier=Avnet, ComponentLink4Description=https://datasheet.ciiva.com/6380/mbr120vlsft1-d-6380910.pdf?src-supplier=Digi-Key, ComponentLink4URL=https://datasheet.ciiva.com/6380/mbr120vlsft1-d-6380910.pdf?src-supplier=Digi-Key, Current Rating=1A, Element Configuration=Single, Forward Current=1A, Halogen Free="Halogen Free", Lead Free="Lead Free", Manufacturer Part Number 1=MBR120VLSFT3G, Max Reverse Voltage (DC)=20V, Max Surge Current=45A, Number of Pins=2, Output Current=1A, Packaging="Tape and Reel", Peak Non-Repetitive Surge Current=45A, Peak Reverse Current=600uA, Polarity=Standard, Pricing 1="1=0.40000, 10=0.32100, 100=0.21880, 500=0.16414, 1000=0.12310 (USD)", Radiation Hardening=No, REACH SVHC="No SVHC", RoHS=Yes, Stock 1=101961, Supplier 1=Digi-Key, Voltage Rating (DC)=20V